# Allegro board bsmu_h750_v1.0.brd
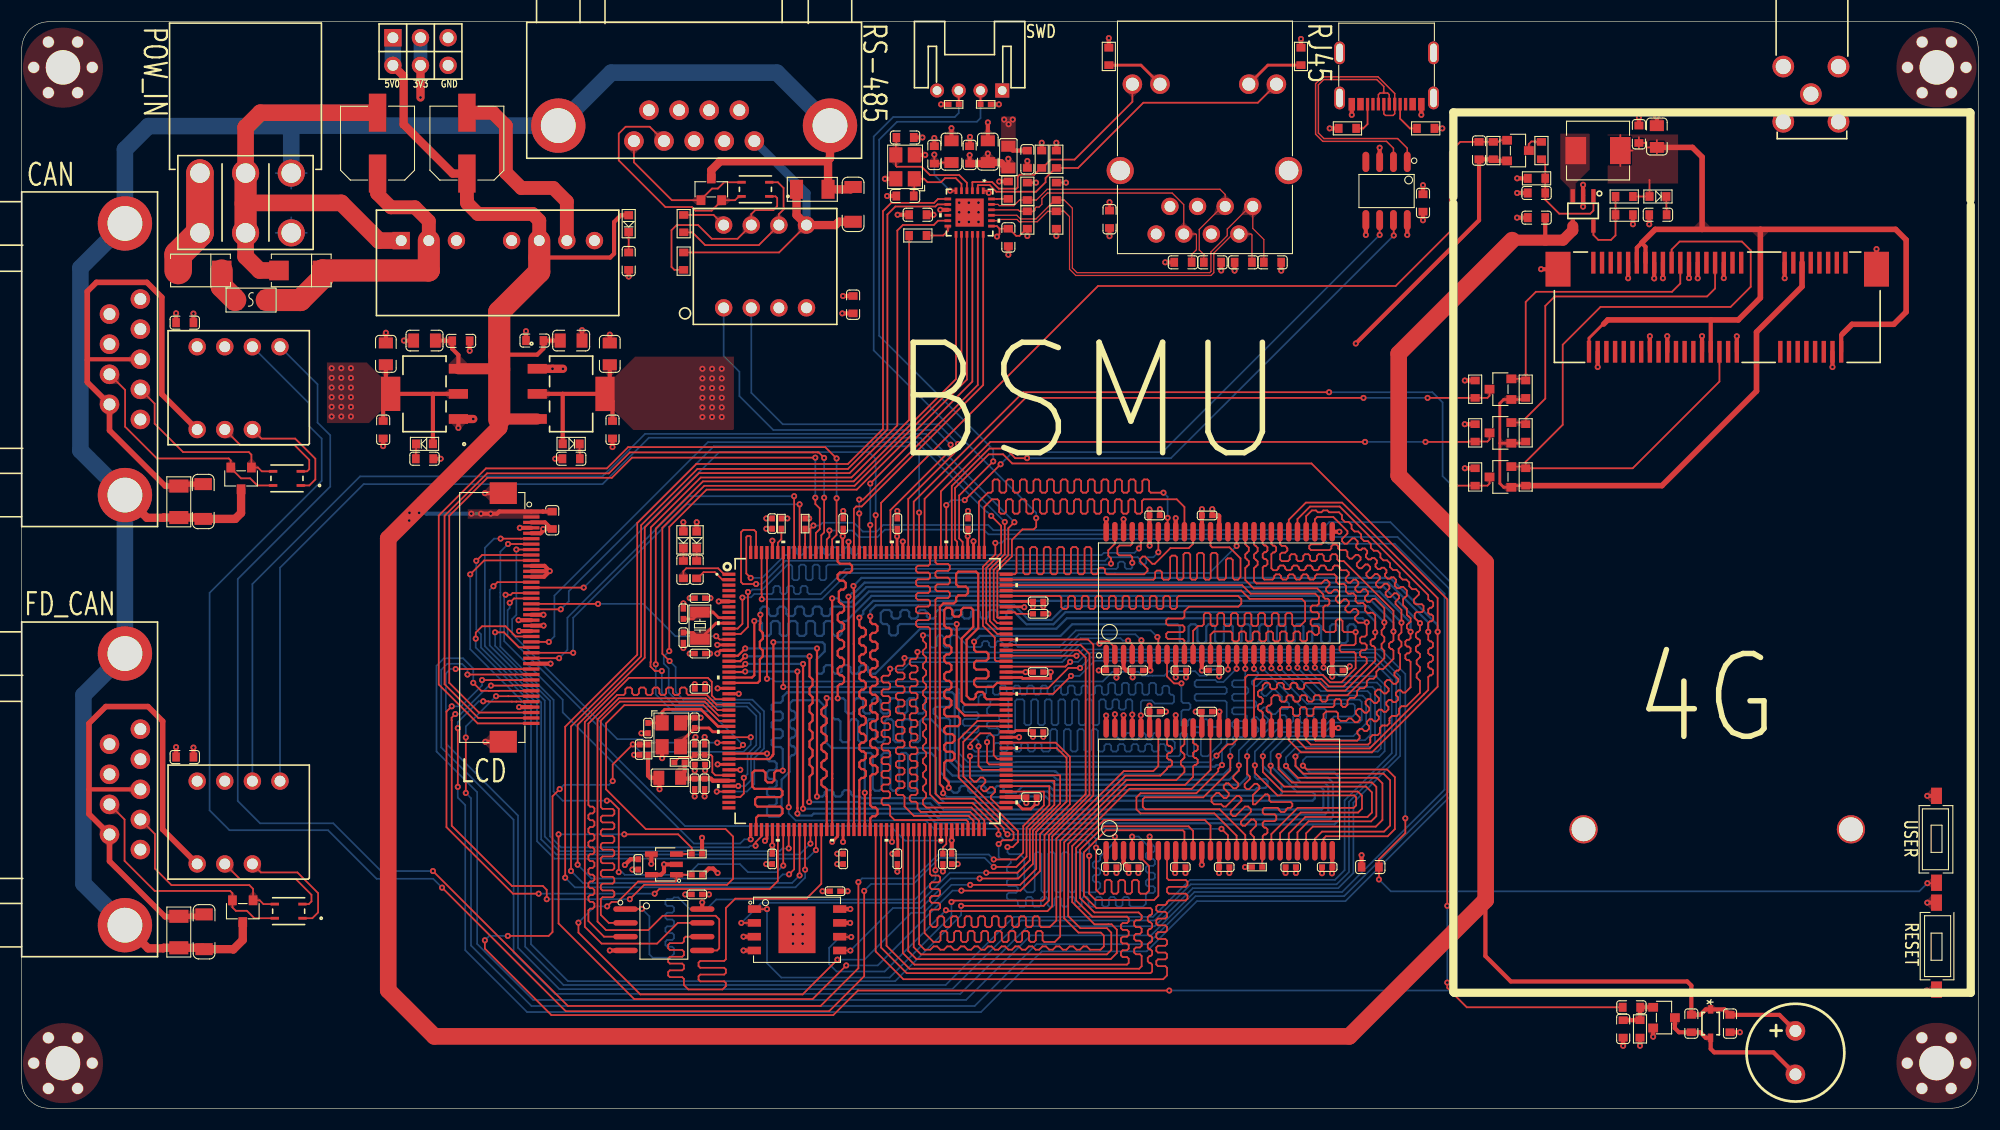
[diagram p0: board, top side]
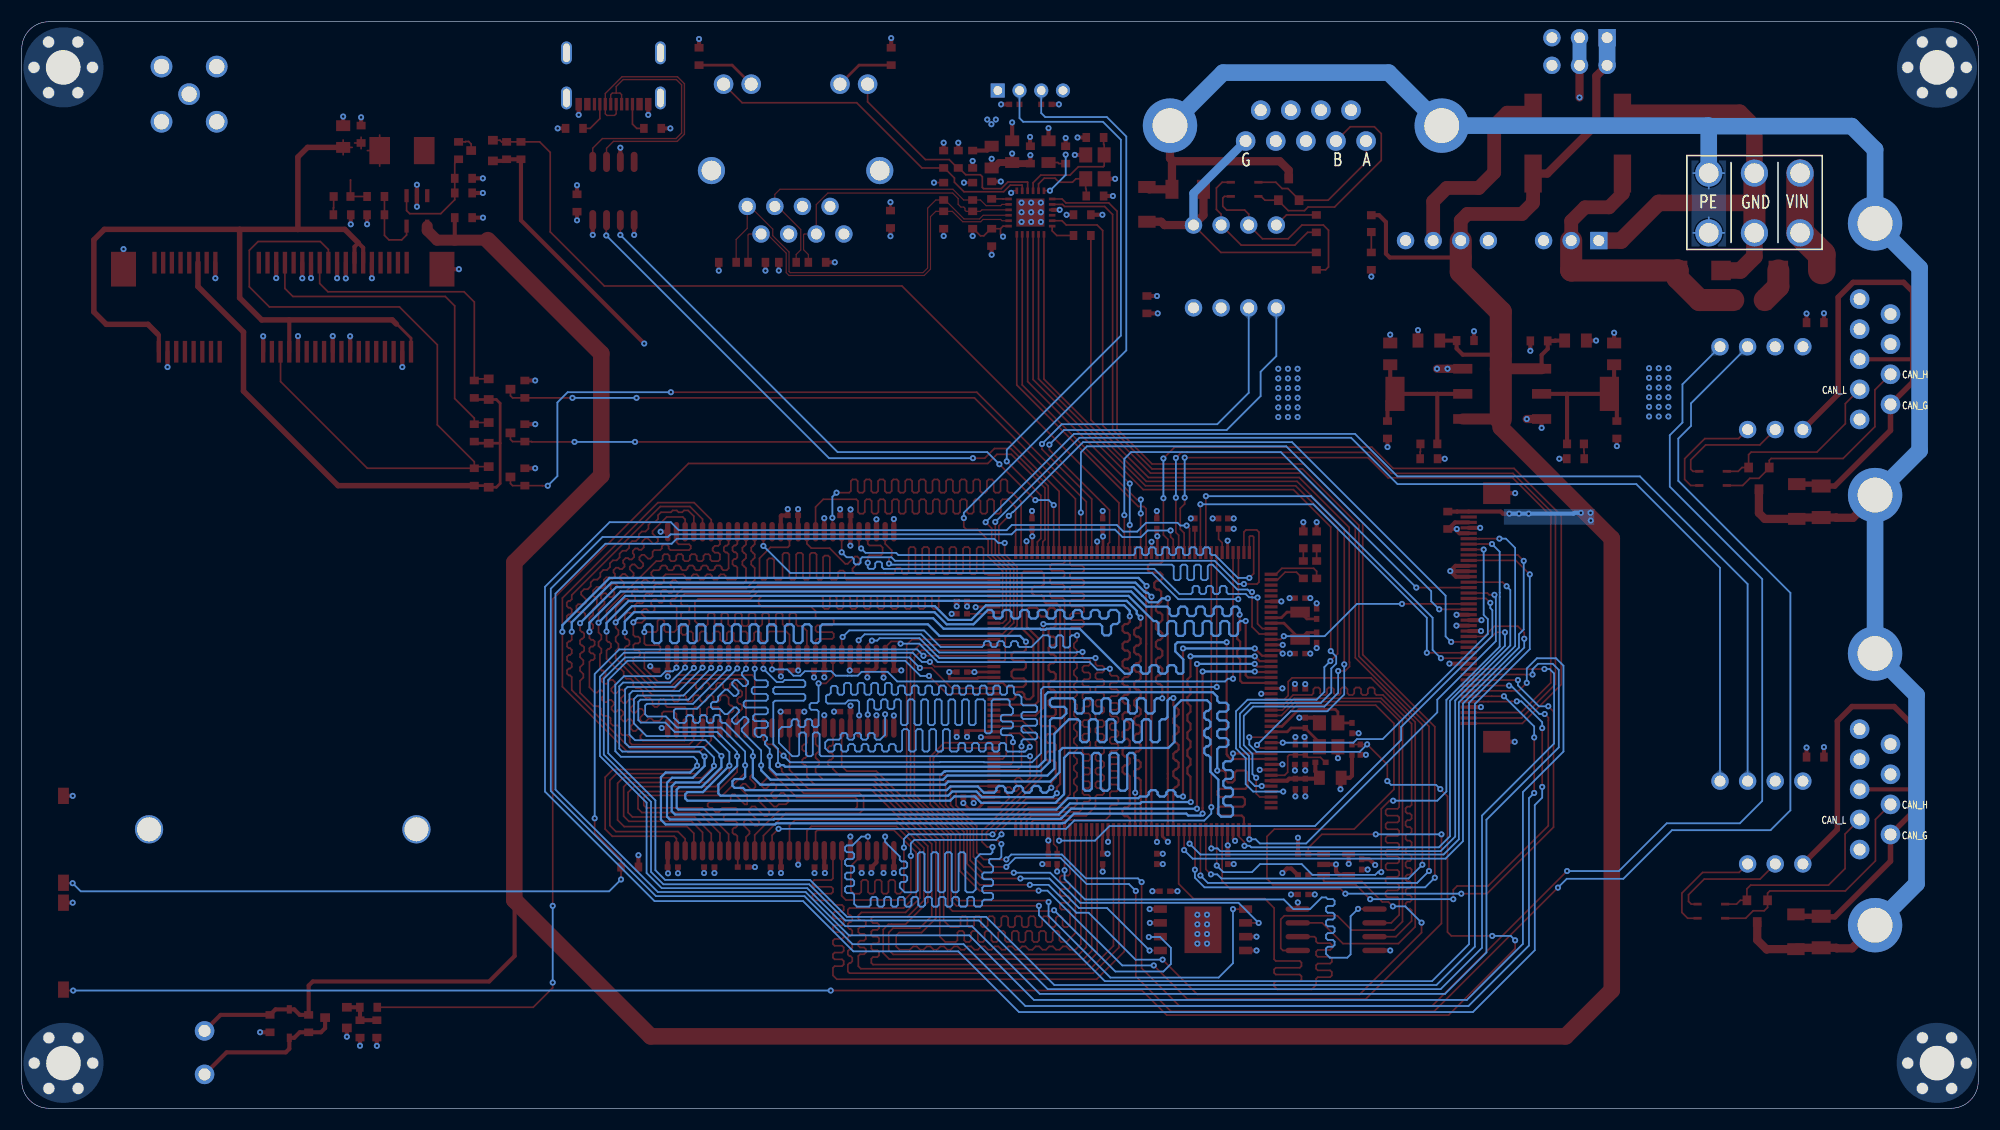
[diagram p1: board, bottom side, seen from below]

Outline 180 x 100 mm; copper layers: TOP, GND, VCC, BOTTOM. Coordinates in mm from the lower left corner of the outline.
Outline path: 0,97.5 0,2.5 arc(0.73,0.73) 2.5,0 177.5,0 arc(179.27,0.73) 180,2.5 180,97.5 arc(179.27,99.27) 177.5,100 2.5,100 arc(0.73,99.27) 0,97.5

## Design rules (mm)
constraint set DEFAULT: min track width 0.156
net group D: nets DN DP
net group TPRX: nets TPRX+ TPRX-
net group TPTX: nets TPTX+ TPTX-
net group MG_QSPI: nets QUADSPI_BK1_IO0 QUADSPI_BK1_IO1 QUADSPI_BK1_IO2 QUADSPI_BK1_IO3 QUADSPI_BK1_NCS QUADSPI_CLK
net group MG_SDRAM_DATA_0_7: nets FMC_D0 FMC_D1 FMC_D2 FMC_D3 FMC_D4 FMC_D5 FMC_D6 FMC_D7 FMC_NBL0
net group MG_SDRAM_DATA_8_15: nets FMC_D8 FMC_D9 FMC_D10 FMC_D11 FMC_D12 FMC_D13 FMC_D14 FMC_D15 FMC_NBL1
net group MG_SDRAM_DATA_16_23: nets FMC_D16 FMC_D17 FMC_D18 FMC_D19 FMC_D20 FMC_D21 FMC_D22 FMC_D23 FMC_NBL2
net group MG_SDRAM_DATA_24_31: nets FMC_D24 FMC_D25 FMC_D26 FMC_D27 FMC_D28 FMC_D29 FMC_D30 FMC_D31 FMC_NBL3
net group POWER: nets CAN_GND POWER_IN VDDA_CORE

## Placement (name value [footprint] x y rotation side)
C13  22pF  [C0402]  57.62 34.99 90 top
C14  2.2uF  [C0402]  93.51 45.51 0 top
C15  22pF  [C0402]  61.91 35.47 90 top
C16  2.2uF  [C0402]  84.75 22.95 270 top
C17  100nF  [C0402]  116.75 22.2 0 top
C18  22pF  [C0402]  60.87 45.51 270 top
C19  22pF  [C0402]  60.87 43.31 90 top
C20  100nF  [C0402]  56.86 33.01 270 top
C21  1uF  [C0402]  62.82 29.86 270 top
C22  100nF  [C0402]  61.91 29.86 270 top
C23  1uF  [C0402]  61.91 33.01 90 top
C24  100nF  [C0402]  62.82 33.01 90 top
C25  100nF  [C0402]  69.05 53.81 90 top
C26  100nF  [C0402]  62.39 46.95 180 top
C27  100nF  [C0402]  62.39 41.85 180 top
C28  100nF  [C0402]  62.39 38.6 180 top
C29  100nF  [C0402]  62.39 31.64 180 top
C30  100nF  [C0402]  69.05 22.95 270 top
C31  100nF  [C0402]  75.58 22.95 270 top
C32  100nF  [C0402]  80.55 22.95 270 top
C33  100nF  [C0402]  85.56 22.95 270 top
C34  100nF  [C0402]  92.9 28.64 0 top
C35  100nF  [C0402]  93.51 34.63 0 top
C36  100nF  [C0402]  93.51 40.15 0 top
C37  100nF  [C0402]  93.51 46.65 0 top
C38  100nF  [C0402]  75.58 53.81 90 top
C39  100nF  [C0402]  80.55 53.81 90 top
C40  100nF  [C0402]  87.06 53.81 90 top
C41  100nF  [C0402]  104.23 54.56 0 top
C42  100nF  [C0402]  109.05 54.56 0 top
C43  100nF  [C0402]  100.24 40.3 0 top
C44  100nF  [C0402]  102.68 40.3 0 top
C45  100nF  [C0402]  106.64 40.3 0 top
C46  100nF  [C0402]  109.69 40.3 180 top
C47  100nF  [C0402]  104.23 36.5 0 top
C48  100nF  [C0402]  109.03 36.5 0 top
C49  100nF  [C0402]  100.24 22.2 0 top
C50  100nF  [C0402]  102.27 22.2 0 top
C51  100nF  [C0402]  106.59 22.2 0 top
C52  100nF  [C0402]  110.63 22.2 0 top
C53  100nF  [C0402]  62.11 19.68 180 top
C54  100nF  [C0402]  74.83 19.98 180 top
C55  100nF  [C0402]  56.73 22.44 90 top
C76  100nF  [C0603]  92.52 87.34 270 top
C77  10uF  [C0805]  88.88 88.04 90 top
C78  100nF  [C0603]  83.96 87.74 90 top
C79  10uF  [C0805]  85.54 88.04 90 top
C80  100nF  [C0603]  82.44 82.23 180 top
C81  100nF  [C0603]  87.21 87.74 90 top
C82  100nF  [C0603]  90.77 80.15 270 top
C83  22nF  [C0603]  100.08 81.82 270 top
C84  10pF  [C0603]  115.07 77.86 0 top
C85  10pF  [C0603]  112.38 77.86 180 top
C86  10pF  [C0603]  109.55 77.86 0 top
C87  10pF  [C0603]  106.83 77.86 180 top
C88  22pF  [C0603]  81.27 83.96 0 top
C89  22pF  [C0603]  81.27 89.35 0 top
C94  100nF  [C0603]  48.8 54.12 270 top
C95  100nF  [C0603]  128.92 83.32 90 top
C96  100nF  [C0402]  121.04 40.3 0 top
C97  100nF  [C0402]  120.1 22.2 180 top
C98  100nF  [C0603]  54.35 62.45 270 top
C99  10uF  [C0805]  54.1 69.43 90 top
C100  10uF  [C0805]  50.55 70.66 0 top
C101  100nF  [C0603]  47.19 70.66 180 top
C102  47uF/50V  [AEC-6R30X7R70-SM]  32.74 88.83 270 top
C103  22uF/50V  [AEC-6R30X7R70-SM]  40.96 88.83 270 top
C104  10uF  [C0805]  37.05 70.66 180 top
C105  100nF  [C0603]  40.41 70.63 0 top
C106  100nF  [C0603]  33.25 62.45 270 top
C107  10uF  [C0805]  33.5 69.43 90 top
C108  1nF/2kV  [C1206]  16.77 16.24 270 top
C109  100nF  [C0603]  15 32.32 180 top
C112  100nF  [C0603]  76.48 73.96 90 top
C113  1nF/2kV  [C1206]  76.48 83.19 90 top
C115  100nF/10V  [C0603]  134.07 88.14 90 top
C116  100nF  [C0603]  157.16 7.79 90 top
C117  100nF  [C0603]  153.6 7.79 270 top
C118  100nF  [C0603]  147.33 7.3 270 top
C119  100nF  [C0603]  15 72.3 180 top
C120  1nF/2kV  [C1206]  16.7 55.84 270 top
C121  10uF/16V  [C0603]  139.36 81.97 180 top
C122  100nF/16V  [C0603]  139.36 84.24 180 top
C123  22uF/16V  [C0805]  150.43 89.43 270 top
C124  100nF/16V  [C0603]  148.78 89.64 270 top
D1  SK34  [SMA]  16.39 77.11 180 top
D2  LED_G  [LED0603]  60.87 52.31 90 top
D3  LED_B  [LED0603]  62.09 52.31 90 top
D4  LED_R  [LED0603]  50.55 61.15 180 top
D5  TVS  [SMA]  25.66 77.11 180 top
D6  LED_R  [LED0603]  55.84 81.42 90 top
D7  LED_R  [LED0603]  37.05 61.15 0 top
D8  PESD1CAN  [SOT23-3]  20.33 18.14 180 top
D9  PESD1CAN  [SOT23-3]  63.44 84.58 0 top
D10  IN4148  [SOD-323]  155.38 7.79 270 top
D11  PESD1CAN  [SOT23-3]  20.18 57.97 180 top
D12  LED_G  [LED0603]  150.53 83.92 180 top
F1  0.5A  [F1206]  21.09 74.38 0 top
FB1  600R 100Mhz  [L0805]  59.61 30.42 0 top
FB2  220R 100Mhz  [L0805]  90.77 87.54 270 top
HOLE1  M3  [STAR-7R62-3R175]  176.19 95.8 0 top
HOLE2  M3  [STAR-7R62-3R175]  176.16 4.15 0 top
HOLE3  M3  [STAR-7R62-3R175]  3.8 4.15 0 top
HOLE4  M3  [STAR-7R62-3R175]  3.8 95.8 0 top
J1  SWD  [PH_2R0_4P_WI]  87.21 93.67 180 top
J2  -  [ATX6PIN]  16.39 80.57 0 top
J3  CONN PWR 3x2-R  [HDR3X2-2R54-TM-VM]  36.69 97.26 0 top
J4  -  [RJ45_LED]  108.81 87.36 180 top
J6  RGBLCD  [FPC40-0R50]  45.59 45.17 270 top
J8  -  [TYPE_C-16PIN]  125.56 94.77 180 top
J9  db9  [DB9_TH]  9.49 29.35 270 top
J10  -  [KH-SMA-KE-Z]  164.6 93.33 0 top
J11  db9  [DB9_TH]  61.86 90.44 180 top
J12  db9  [DB9_TH]  9.49 68.94 270 top
J13  -  [MINI_PCIE_52PIN]  155.99 73.72 180 top
L1  4.7uH  [MWSA0503]  145.02 88.14 0 top
Q1  BSS138  [SOT23-3]  136.04 66.18 90 top
Q2  BSS138  [SOT23-3]  136.04 62.16 90 top
Q3  AP3407  [SOT23-3]  137.65 88.14 270 top
Q4  1R1001  [SOT23-3]  151.09 8.34 270 top
Q5  BSS138  [SOT23-3]  136.04 58.1 90 top
R8  10k  [R0402]  57.62 33.01 90 top
R9  10k  [R0402]  72.07 53.81 90 top
R10  10k  [R0402]  88.68 92.39 180 top
R11  10k  [R0402]  85.74 92.39 0 top
R12  0R  [R0402]  60.51 31.84 180 top
R13  10k  [R0402]  69.89 53.81 90 top
R14  10k  [R0402]  113.65 22.2 0 top
R15  4.7k  [R0402]  62.11 21.48 0 top
R16  4.7k  [R0402]  62.11 23.41 0 top
R25  510R  [R0603]  82.44 80.33 0 top
R26  49.9R  [R0603]  95.18 84.39 90 top
R27  49.9R  [R0603]  95.18 81.75 270 top
R28  49.9R  [R0603]  92.52 84.39 90 top
R29  49.9R  [R0603]  92.52 81.75 270 top
R30  10k  [R0603]  93.84 87.34 90 top
R31  10k  [R0603]  95.18 87.34 90 top
R32  510R  [R0603]  117.69 96.81 270 top
R33  510R  [R0603]  100.01 96.81 270 top
R34  12.1k  [R0603]  90.77 84.49 270 top
R36  1k  [C0603]  60.87 49.57 90 top
R37  1k  [C0603]  62.09 49.57 90 top
R38  10k  [C0603]  124.06 22.2 0 top
R39  5.1k  [R0603]  129.16 90.18 180 top
R40  5.1k  [R0603]  121.96 90.18 0 top
R41  1k  [C0603]  50.55 59.78 0 top
R42  1k  [C0603]  55.84 77.97 90 top
R43  1k  [C0603]  37.05 59.78 180 top
R44  1M  [R1206]  14.45 16.22 90 top
R45  NC  [R0603]  60.89 81.42 90 top
R46  NC  [R0603]  60.89 77.97 270 top
R47  1M  [R1206]  72.73 84.58 180 top
R48  4k7  [R0603]  133.71 66.18 90 top
R49  4k7  [R0603]  133.71 62.16 90 top
R50  4k7  [R0603]  138.36 66.18 90 top
R51  4k7  [R0603]  138.36 62.16 90 top
R52  10k  [R0603]  139.81 88.14 270 top
R53  47k  [R0603]  135.39 88.14 270 top
R54  100k  [R0603]  139.36 85.59 0 top
R56  3k3  [C0603]  148.09 9.29 0 top
R57  3k3  [R0603]  148.88 7.3 270 top
R58  1M  [R1206]  14.45 55.82 90 top
R59  4k7  [R0603]  133.71 58.1 90 top
R60  4k7  [R0603]  138.36 58.1 90 top
R61  59k  [R0603]  147.43 83.92 0 top
R62  11k  [R0603]  147.43 82.23 180 top
R63  1k  [C0603]  150.53 82.23 0 top
SW1  SW_NSRT  [SW2_6R0X3R6]  176.16 14.92 270 top
SW3  USER_SW  [SW2_6R0X3R6]  176.16 24.75 90 top
T1  ACM2520  [ACM2520-601-2P-T002_TDK]  24.56 18.14 180 top
T2  ACM2520  [ACM2520-601-2P-T002_TDK]  67.5 84.58 180 top
T3  ACM2520  [ACM2520-601-2P-T002_TDK]  24.4 57.97 180 top
U3  STM32H750IBT6  [LQFP176_24X24_STM]  77.81 38.4 0 top
U4  w9825g6kh-6i  [TSOP-54-400MIL]  110.17 29.35 0 top
U5  w9825g6kh-6i  [TSOP-54-400MIL]  110.17 47.41 0 top
U6  CODE_FLASH  [SOIC-8-208MIL]  59.07 16.43 0 top
U7  DATA_FLASH  [WSON8-8X6]  71.33 16.43 0 top
U8  AT24C02  [SOT23-5]  59.07 22.44 90 top
U13  LAN8720A-CP  [QFN24-6X6_MC_MCH]  87.21 82.44 270 top
U15  CH340N  [SOP-8-150MIL]  125.56 84.42 180 top
U16  AMS1117-3V3  [SOT223]  50.55 65.75 270 top
U17  -  [VRB2405S_10WR3]  42.53 79.86 0 top
U18  AMS1117-3V3  [SOT223]  37.05 65.75 90 top
U19  -  [TD301MCANFD]  23.76 22.49 180 top
U21  -  [TD301M485]  64.58 73.67 0 top
U23  BEEP  [BEEP_D9]  163.18 5.12 270 top
U24  -  [TD301MCANFD]  23.76 62.47 180 top
U25  JW5211  [TSOT23-5]  143.64 82.59 270 top
X1  25MHz  [XTAL4-3225-SM]  59.76 34.37 270 top
X2  32.768kHz  [XTAL2-3215-SM]  62.39 44.41 90 top
X3  25MHz  [XTAL4-3225-SM]  81.27 86.64 90 top

## Library data of the parts
C13-C55 C76-C89 C94-C101 C104-C109 C112 C113 C115-C124 = CAP NP
C102 C103 = CAP POL
D1 = DIODE SCHOTTKY21_0
D2-D4 D6 D7 D12 = LED_0
D5 = DIODE TVS_1
D8 D9 D11 = PESD1CAN
D10 = DIODE_0: User Part Number: PN; Tolerance: TOL
F1 = FUSE
FB1 FB2 L1 = INDUCTOR
HOLE1-HOLE4 = M3
J1 = CON4
J2 = ATX6PIN
J3 = CONN PWR 3x2-R
J4 = RJ45_LED
J6 = CONN SOCKET 42
J8 = TYPE_C-16PIN
J9 J11 J12 = db9
J10 = KH-SMA-KE-Z
J13 = MINI_PCIE_52PIN
Q1 Q2 Q5 = BSS138_0
Q3 = MOSFET P_2
Q4 = 1R1001_2
R8-R16 R25-R34 R36-R54 R56-R63 = RESISTOR
SW1 SW3 = SW PUSHBUTTON
T1-T3 = TRANSFORMER_0: User Part Number: PN; Tolerance: TOL
U3 = STM32H750IBT6: User Part Number: PN; Tolerance: TOL
U4 U5 = w9825g6kh-6i
U6 = W25Qxx
U7 = W25Qxx_EP
U8 = AT24C02
U13 = LAN8720A-CP: User Part Number: PN; Tolerance: TOL
U15 = CH340N
U16 U18 = AMS1117: User Part Number: PN; Tolerance: TOL
U17 = VRB2405S_10WR3
U19 U24 = TD301MCANFD
U21 = TD301M485
U23 = BEEP
U25 = JW5211
X1 X3 = XTAL4
X2 = CRYSTAL/SM

## Footprints (pads in the part's own frame, mm; a bottom-side part is the same pattern mirrored in y, then rotated)
ACM2520-601-2P-T002_TDK
  rect 0.757x0.255 smd: 1(-1.268,0.65) 2(-1.268,-0.65) 3(1.268,-0.65) 4(1.268,0.65)
AEC-6R30X7R70-SM
  rect 3.5x1.6 smd: 1(2.8,0) 2(-2.8,0)
ATX6PIN
  round 2.5 hole 1.8: 1(0,5.5) 2(4.2,5.5) 3(8.4,5.5) 4(0,0) 5(4.2,0) 6(8.4,0)
BEEP_D9
  round 1.8 hole 1.1: 1(-2,0) 2(2,0)
C0402
  rect 0.55x0.5 smd: 1(-0.475,0) 2(0.475,0)
C0603
  rect 0.7x0.83 smd: 1(-0.8,0) 2(0.8,0)
C0805
  rect 1x1.3 smd: 1(-1,0) 2(1,0)
C1206
  rect 1.1x1.6 smd: 1(-1.6,0) 2(1.6,0)
DB9_TH
  round 1.8 hole 1.1: 1(5.54,1.42) 2(2.77,1.42) 3(0,1.42) 4(-2.77,1.42) 5(-5.54,1.42) 6(4.155,-1.42) 7(1.385,-1.42) 8(-1.385,-1.42) 9(-4.155,-1.42)
  round 5 hole 3.2: 10(-12.5,0) 11(12.5,0)
F1206
  rect 1.2x1.75 smd: 1(-1.45,0) 2(1.45,0)
FPC40-0R50
  rect 0.3x1.5 smd: 1(-9.75,1.288) 2(-9.25,1.288) 3(-8.75,1.288) 4(-8.25,1.288) 5(-7.75,1.288) 6(-7.25,1.288) 7(-6.75,1.288) 8(-6.25,1.288) 9(-5.75,1.288) 10(-5.25,1.288) 11(-4.75,1.288) 12(-4.25,1.288) 13(-3.75,1.288) 14(-3.25,1.288) 15(-2.75,1.288) 16(-2.25,1.288) 17(-1.75,1.288) 18(-1.25,1.288) 19(-0.75,1.288) 20(-0.25,1.288) 21(0.25,1.288) 22(0.75,1.288) 23(1.25,1.288) 24(1.75,1.288) 25(2.25,1.288) 26(2.75,1.288) 27(3.25,1.288) 28(3.75,1.288) 29(4.25,1.288) 30(4.75,1.288) 31(5.25,1.288) 32(5.75,1.288) 33(6.25,1.288) 34(6.75,1.288) 35(7.25,1.288) 36(7.75,1.288) 37(8.25,1.288) 38(8.75,1.288) 39(9.25,1.288) 40(9.75,1.288)
  rect 2x2.5 smd: 41(-11.44,-1.288) 42(11.44,-1.288)
HDR3X2-2R54-TM-VM
  rect 1.6x1.6 hole 1: 1(-2.54,1.27)
  round 1.6 hole 1: 2(0,1.27) 3(2.54,1.27) 4(-2.54,-1.27) 5(0,-1.27) 6(2.54,-1.27)
KH-SMA-KE-Z
  round 2 hole 1.4: 1(0,0) 2(-2.54,2.54) 3(2.54,2.54) 4(-2.54,-2.54) 5(2.54,-2.54)
L0805
  rect 1x1.3 smd: 1(-1,0) 2(1,0)
LED0603
  rect 0.75x0.8 smd: 1(-0.775,0) 2(0.775,0)
LQFP176_24X24_STM
  rect 1.194x0.305 smd: 1(-12.75,10.75) 2(-12.75,10.25) 3(-12.75,9.75) 4(-12.75,9.25) 5(-12.75,8.75) 6(-12.75,8.25) 7(-12.75,7.75) 8(-12.75,7.25) 9(-12.75,6.75) 10(-12.75,6.25) 11(-12.75,5.75) 12(-12.75,5.25) 13(-12.75,4.75) 14(-12.75,4.25) 15(-12.75,3.75) 16(-12.75,3.25) 17(-12.75,2.75) 18(-12.75,2.25) 19(-12.75,1.75) 20(-12.75,1.25) 21(-12.75,0.75) 22(-12.75,0.25) 23(-12.75,-0.25) 24(-12.75,-0.75) 25(-12.75,-1.25) 26(-12.75,-1.75) 27(-12.75,-2.25) 28(-12.75,-2.75) 29(-12.75,-3.25) 30(-12.75,-3.75) 31(-12.75,-4.25) 32(-12.75,-4.75) 33(-12.75,-5.25) 34(-12.75,-5.75) 35(-12.75,-6.25) 36(-12.75,-6.75) 37(-12.75,-7.25) 38(-12.75,-7.75) 39(-12.75,-8.25) 40(-12.75,-8.75) 41(-12.75,-9.25) 42(-12.75,-9.75) 43(-12.75,-10.25) 44(-12.75,-10.75) 89(12.75,-10.75) 90(12.75,-10.25) 91(12.75,-9.75) 92(12.75,-9.25) 93(12.75,-8.75) 94(12.75,-8.25) 95(12.75,-7.75) 96(12.75,-7.25) 97(12.75,-6.75) 98(12.75,-6.25) 99(12.75,-5.75) 100(12.75,-5.25) 101(12.75,-4.75) 102(12.75,-4.25) 103(12.75,-3.75) 104(12.75,-3.25) 105(12.75,-2.75) 106(12.75,-2.25) 107(12.75,-1.75) 108(12.75,-1.25) 109(12.75,-0.75) 110(12.75,-0.25) 111(12.75,0.25) 112(12.75,0.75) 113(12.75,1.25) 114(12.75,1.75) 115(12.75,2.25) 116(12.75,2.75) 117(12.75,3.25) 118(12.75,3.75) 119(12.75,4.25) 120(12.75,4.75) 121(12.75,5.25) 122(12.75,5.75) 123(12.75,6.25) 124(12.75,6.75) 125(12.75,7.25) 126(12.75,7.75) 127(12.75,8.25) 128(12.75,8.75) 129(12.75,9.25) 130(12.75,9.75) 131(12.75,10.25) 132(12.75,10.75)
  rect 0.305x1.194 smd: 45(-10.75,-12.75) 46(-10.25,-12.75) 47(-9.75,-12.75) 48(-9.25,-12.75) 49(-8.75,-12.75) 50(-8.25,-12.75) 51(-7.75,-12.75) 52(-7.25,-12.75) 53(-6.75,-12.75) 54(-6.25,-12.75) 55(-5.75,-12.75) 56(-5.25,-12.75) 57(-4.75,-12.75) 58(-4.25,-12.75) 59(-3.75,-12.75) 60(-3.25,-12.75) 61(-2.75,-12.75) 62(-2.25,-12.75) 63(-1.75,-12.75) 64(-1.25,-12.75) 65(-0.75,-12.75) 66(-0.25,-12.75) 67(0.25,-12.75) 68(0.75,-12.75) 69(1.25,-12.75) 70(1.75,-12.75) 71(2.25,-12.75) 72(2.75,-12.75) 73(3.25,-12.75) 74(3.75,-12.75) 75(4.25,-12.75) 76(4.75,-12.75) 77(5.25,-12.75) 78(5.75,-12.75) 79(6.25,-12.75) 80(6.75,-12.75) 81(7.25,-12.75) 82(7.75,-12.75) 83(8.25,-12.75) 84(8.75,-12.75) 85(9.25,-12.75) 86(9.75,-12.75) 87(10.25,-12.75) 88(10.75,-12.75) 133(10.75,12.75) 134(10.25,12.75) 135(9.75,12.75) 136(9.25,12.75) 137(8.75,12.75) 138(8.25,12.75) 139(7.75,12.75) 140(7.25,12.75) 141(6.75,12.75) 142(6.25,12.75) 143(5.75,12.75) 144(5.25,12.75) 145(4.75,12.75) 146(4.25,12.75) 147(3.75,12.75) 148(3.25,12.75) 149(2.75,12.75) 150(2.25,12.75) 151(1.75,12.75) 152(1.25,12.75) 153(0.75,12.75) 154(0.25,12.75) 155(-0.25,12.75) 156(-0.75,12.75) 157(-1.25,12.75) 158(-1.75,12.75) 159(-2.25,12.75) 160(-2.75,12.75) 161(-3.25,12.75) 162(-3.75,12.75) 163(-4.25,12.75) 164(-4.75,12.75) 165(-5.25,12.75) 166(-5.75,12.75) 167(-6.25,12.75) 168(-6.75,12.75) 169(-7.25,12.75) 170(-7.75,12.75) 171(-8.25,12.75) 172(-8.75,12.75) 173(-9.25,12.75) 174(-9.75,12.75) 175(-10.25,12.75) 176(-10.75,12.75)
MINI_PCIE_52PIN
  round 0 hole 1.75 unplated: (-12.5,0)
  round 0 hole 1.25 unplated: (12.5,0)
  rect 0.4x2 smd: 1(-11.8,-4.1) 2(-11.4,4.1) 3(-11,-4.1) 4(-10.6,4.1) 5(-10.2,-4.1) 6(-9.8,4.1) 7(-9.4,-4.1) 8(-9,4.1) 9(-8.6,-4.1) 10(-8.2,4.1) 11(-7.8,-4.1) 12(-7.4,4.1) 13(-7,-4.1) 14(-6.6,4.1) 15(-6.2,-4.1) 16(-5.8,4.1) 17(-2.2,-4.1) 18(-1.8,4.1) 19(-1.4,-4.1) 20(-1,4.1) 21(-0.6,-4.1) 22(-0.2,4.1) 23(0.2,-4.1) 24(0.6,4.1) 25(1,-4.1) 26(1.4,4.1) 27(1.8,-4.1) 28(2.2,4.1) 29(2.6,-4.1) 30(3,4.1) 31(3.4,-4.1) 32(3.8,4.1) 33(4.2,-4.1) 34(4.6,4.1) 35(5,-4.1) 36(5.4,4.1) 37(5.8,-4.1) 38(6.2,4.1) 39(6.6,-4.1) 40(7,4.1) 41(7.4,-4.1) 42(7.8,4.1) 43(8.2,-4.1) 44(8.6,4.1) 45(9,-4.1) 46(9.4,4.1) 47(9.8,-4.1) 48(10.2,4.1) 49(10.6,-4.1) 50(11,4.1) 51(11.4,-4.1) 52(11.8,4.1)
  rect 2.3x3.2 smd: 53(-14.65,-3.5) 54(14.65,-3.5)
  round 2.6 hole 2.2: 55(-12.3,48.05) 56(12.3,48.05)
MWSA0503
  rect 1.9x2.5 smd: 1(-2.05,0) 2(2.05,0)
PH_2R0_4P_WI
  rect 1.3x1.3 hole 0.8: 1(-3,0)
  round 1.3 hole 0.8: 2(-1,0) 3(1,0) 4(3,0)
QFN24-6X6_MC_MCH
  rect 0.605x0.255 smd: 1(-2.004,1.25) 2(-2.004,0.75) 3(-2.004,0.25) 4(-2.004,-0.25) 5(-2.004,-0.75) 6(-2.004,-1.25) 13(2.004,-1.25) 14(2.004,-0.75) 15(2.004,-0.25) 16(2.004,0.25) 17(2.004,0.75) 18(2.004,1.25)
  rect 0.255x0.605 smd: 7(-1.25,-2.004) 8(-0.75,-2.004) 9(-0.25,-2.004) 10(0.25,-2.004) 11(0.75,-2.004) 12(1.25,-2.004) 19(1.25,2.004) 20(0.75,2.004) 21(0.25,2.004) 22(-0.25,2.004) 23(-0.75,2.004) 24(-1.25,2.004)
  rect 2.591x2.591 smd: 25(0,0)
R0402
  rect 0.55x0.5 smd: 1(-0.475,0) 2(0.475,0)
R0603
  rect 0.7x0.83 smd: 1(-0.8,0) 2(0.8,0)
R1206
  rect 1.2x1.75 smd: 1(-1.45,0) 2(1.45,0)
RJ45_LED
  round 0 hole 3.3 unplated: (-5.7,-2) (5.7,-2)
  round 1.6 hole 1: 1(-4.45,4.355) 2(-3.18,6.895) 3(-1.91,4.355) 4(-0.64,6.895) 5(0.63,4.355) 6(1.9,6.895) 7(3.17,4.355) 8(4.44,6.895)
  round 1.8 hole 1.2: 9(-6.625,-6.895) 10(-4.085,-6.895) 11(4.085,-6.895) 12(6.625,-6.895)
  round 2.5 hole 1.8: 13(-7.745,1.055) 14(7.745,1.055)
SMA
  rect 1.8x1.8 smd: 1(-2,0) 2(2,0)
SOD-323
  rect 0.776x0.466 smd: 1(-1.308,0) 2(1.308,0)
SOIC-8-208MIL
  oval 2.25x0.5 smd: 1(-3.53,1.905) 2(-3.53,0.635) 3(-3.53,-0.635) 4(-3.53,-1.905) 5(3.53,-1.905) 6(3.53,-0.635) 7(3.53,0.635) 8(3.53,1.905)
SOP-8-150MIL
  oval 0.63x1.865 smd: 1(-1.905,-2.682) 2(-0.635,-2.682) 3(0.635,-2.682) 4(1.905,-2.682) 5(1.905,2.682) 6(0.635,2.682) 7(-0.635,2.682) 8(-1.905,2.682)
SOT23-3
  rect 0.8x0.9 smd: 1(-0.95,-1) 2(0.95,-1) 3(0,1)
SOT23-5
  rect 0.5x1.175 smd: 1(-0.95,-1.154) 2(0,-1.154) 3(0.95,-1.154) 4(0.95,1.154) 5(-0.95,1.154)
SOT223
  rect 0.889x1.765 smd: 1(-2.311,-3.118) 2(0,-3.118) 3(2.311,-3.118)
  rect 3.15x1.765 smd: 4(0,3.118)
STAR-7R62-3R175
  round 1.1 hole 1: 1(2.692,0) 2(-2.692,0) 3(1.346,2.332) 4(-1.346,2.332) 5(-1.346,-2.332) 6(1.346,-2.332)
  round 3.2 hole 3.15: 7(0,0)
SW2_6R0X3R6
  rect 1.5x1 smd: 1(-4,0) 2(4,0)
TD301M485
  round 1.6 hole 1: 1(0,0) 2(2.54,0) 3(5.08,0) 4(7.62,0) 5(7.62,7.62) 6(5.08,7.62) 7(2.54,7.62) 8(0,7.62)
TD301MCANFD
  round 1.6 hole 1: 1(0,-7.62) 2(2.54,-7.62) 3(5.08,-7.62) 4(7.62,-7.62) 5(7.62,0) 6(5.08,0) 7(2.54,0)
TSOP-54-400MIL
  oval 0.5x1.8 smd: 1(-10.4,-5.65) 2(-9.6,-5.65) 3(-8.8,-5.65) 4(-8,-5.65) 5(-7.2,-5.65) 6(-6.4,-5.65) 7(-5.6,-5.65) 8(-4.8,-5.65) 9(-4,-5.65) 10(-3.2,-5.65) 11(-2.4,-5.65) 12(-1.6,-5.65) 13(-0.8,-5.65) 14(0,-5.65) 15(0.8,-5.65) 16(1.6,-5.65) 17(2.4,-5.65) 18(3.2,-5.65) 19(4,-5.65) 20(4.8,-5.65) 21(5.6,-5.65) 22(6.4,-5.65) 23(7.2,-5.65) 24(8,-5.65) 25(8.8,-5.65) 26(9.6,-5.65) 27(10.4,-5.65) 28(10.4,5.65) 29(9.6,5.65) 30(8.8,5.65) 31(8,5.65) 32(7.2,5.65) 33(6.4,5.65) 34(5.6,5.65) 35(4.8,5.65) 36(4,5.65) 37(3.2,5.65) 38(2.4,5.65) 39(1.6,5.65) 40(0.8,5.65) 41(0,5.65) 42(-0.8,5.65) 43(-1.6,5.65) 44(-2.4,5.65) 45(-3.2,5.65) 46(-4,5.65) 47(-4.8,5.65) 48(-5.6,5.65) 49(-6.4,5.65) 50(-7.2,5.65) 51(-8,5.65) 52(-8.8,5.65) 53(-9.6,5.65) 54(-10.4,5.65)
TSOT23-5
  rect 1.2x0.4 smd: 1(-1.4,0.95) 2(-1.4,0) 3(-1.4,-0.95) 4(1.4,-0.95) 5(1.4,0.95)
TYPE_C-16PIN
  round 0 hole 0.65 unplated: (-2.9,1.2) (2.9,1.2)
  oval 1x2.1 hole 0.6x1.7: 1(-4.321,1.788) 2(4.321,1.788) 3(-4.321,-2.362) 4(4.321,-2.362)
  rect 0.6x1.15 smd: A1B12(-3.2,2.362) A4B9(-2.4,2.362) B1A12(3.2,2.362) B4A9(2.4,2.362)
  rect 0.3x1.15 smd: A5(-1.25,2.362) A6(-0.25,2.362) A7(0.25,2.362) A8(-1.75,2.362) B5(1.75,2.362) B6(0.75,2.362) B7(-0.75,2.362) B8(1.25,2.362)
VRB2405S_10WR3
  rect 1.6x1.6 hole 1: 1(-7.62,0)
  round 1.6 hole 1: 2(-5.08,0) 3(-2.54,0) 5(2.54,0) 6(5.08,0) 7(7.62,0) 8(10.16,0)
WSON8-8X6
  rect 1.2x0.7 smd: 1(-3.919,1.905) 2(-3.919,0.635) 3(-3.919,-0.635) 4(-3.919,-1.905) 5(3.919,-1.905) 6(3.919,-0.635) 7(3.919,0.635) 8(3.919,1.905)
  rect 3.4x4.3 smd: 9(0,0)
XTAL2-3215-SM
  rect 1x1.8 smd: 1(-1.25,0) 2(1.25,0)
XTAL4-3225-SM
  rect 1.4x1.2 smd: 1(-1.1,-0.85) 2(1.1,-0.85) 3(1.1,0.85) 4(-1.1,0.85)

## Nets
GND: C13.1 C14.2 C15.2 C16.2 C17.2 C18.1 C19.1 C20.2 C21.2 C22.2 C23.2 C24.2 C25.2 C26.2 C27.2 C28.2 C29.2 C30.2 C31.2 C32.2 C33.2 C34.2 C35.2 C36.2 C37.2 C38.2 C39.2 C40.2 C41.2 C42.2 C43.2 C44.2 C45.2 C46.2 C47.2 C48.2 C49.2 C50.2 C51.2 C52.2 C53.2 C54.2 C55.1 C76.2 C77.2 C78.2 C79.2 C80.2 C81.2 C82.2 C83.2 C84.2 C85.2 C86.2 C87.2 C88.1 C89.2 C94.2 C95.2 C96.2 C97.2 C98.2 C99.2 C100.2 C101.2 C103.2 C104.2 C105.2 C106.2 C107.2 C109.2 C112.2 C116.1 C118.2 C119.2 C121.2 C122.2 C123.1 C124.1 HOLE1.1 HOLE1.2 HOLE1.3 HOLE1.4 HOLE1.5 HOLE1.6 HOLE1.7 HOLE2.1 HOLE2.2 HOLE2.3 HOLE2.4 HOLE2.5 HOLE2.6 HOLE2.7 HOLE3.1 HOLE3.2 HOLE3.3 HOLE3.4 HOLE3.5 HOLE3.6 HOLE3.7 HOLE4.1 HOLE4.2 HOLE4.3 HOLE4.4 HOLE4.5 HOLE4.6 HOLE4.7 J1.4 J3.3 J3.6 J4.8 J4.13 J4.14 J6.3 J6.4 J6.5 J6.11 J6.12 J6.13 J6.20 J6.21 J6.22 J6.23 J6.29 J6.37 J6.41 J6.42 J8.1 J8.2 J8.3 J8.4 J8.A1B12 J8.B1A12 J10.2 J10.3 J10.4 J10.5 J13.4 J13.15 J13.18 J13.21 J13.26 J13.27 J13.29 J13.34 J13.35 J13.37 J13.38 J13.43 J13.50 J13.53 J13.54 J13.55 J13.56 Q4.2(E) R9.2 R13.2 R30.2 R31.2 R32.1 R33.1 R34.1 R39.1 R40.1 R41.1 R42.1 R43.1 R54.1 R57.2 R62.1 R63.1 SW1.1 SW3.2 U3.14 U3.22 U3.37 U3.48 U3.61 U3.71 U3.90 U3.102 U3.113 U3.126 U3.135(VSS_9) U3.148 U3.158 U4.6 U4.12 U4.28 U4.41 U4.46 U4.52 U4.54 U5.6 U5.12 U5.28 U5.41 U5.46 U5.52 U5.54 U6.4 U7.4 U7.9 U8.2 U8.5(WP) U13.25 U15.3 U16.1 U17.7 U18.1 U19.3 U21.3 U24.3 U25.2 X1.2 X1.4 X3.2 X3.4
GND_EARTH: C108.2 C113.2 C120.2 D8.3 D9.3 D11.3 J2.3 J2.6 J9.10 J9.11 J11.10 J11.11 J12.10 J12.11 R44.1 R47.1 R58.1
PGND: C102.2 D5.2 J2.2 J2.5 U17.1
VCC_3V3: C76.1 C80.1 C95.1 C106.1 C107.1 C109.1 C112.1 C119.1 D7.2 FB2.1 J1.1 J3.2 J3.5 R10.1 R11.1 U13.9(VDDIO) U15.5(VCC) U15.8 U18.2 U18.4(VOUT_1) U19.4(VCC) U21.4 U24.4(VCC)
VCC_3V3E: C77.1 C81.1 C82.1 C83.1 FB2.2 J4.4 J4.5 R26.2 R27.2 R28.2 R29.2 U13.1 U13.19
VCC_3V8: C123.2 C124.2 D12.2 J13.2 J13.24 J13.39 J13.41 J13.52 L1.2 R61.2
VCC_3V8_EN: C122.1 R52.2 R54.2 U25.1
VCC_5V0: C94.1 C100.1 C101.1 C103.1 C104.1 C105.1 C116.2 C117.1 C121.1 D6.2 D10.1(K) J3.1 J3.4 J6.1 J6.2 U16.3 U17.6(VO) U18.3 U23.1 U25.4(VIN)
VCC_24V: C102.1 D5.1(CATHODE) F1.2 U17.2
VCC_CORE_3V3: C17.1 C25.1 C26.1 C27.1 C28.1 C29.1 C30.1 C31.1 C32.1 C33.1 C34.1 C35.1 C36.1 C37.1 C38.1 C39.1 C40.1 C41.1 C42.1 C43.1 C44.1 C45.1 C46.1 C47.1 C48.1 C49.1 C50.1 C51.1 C52.1 C53.1 C54.1 C55.2 C96.1 C97.1 C98.1 C99.1 C115.1 D2.2 D3.2 D4.2 FB1.1 Q3.2 R8.1 R14.1 R15.2 R16.2 R38.1 R48.2 R49.2 R53.2 R59.2 U3.6 U3.15 U3.23 U3.36 U3.49 U3.62 U3.72 U3.82 U3.91 U3.103 U3.114 U3.127 U3.136 U3.149 U3.159 U3.172 U4.1 U4.3 U4.9 U4.14 U4.27 U4.43 U4.49 U5.1 U5.3 U5.9 U5.14 U5.27 U5.43 U5.49 U6.8 U7.3(WP#(IO2)) U7.7 U7.8 U8.4 U16.2 U16.4(VOUT_1)
VDD_EXT: J13.11 Q1.1 Q2.1 Q5.1 R50.1 R51.1 R60.1
VDDA_CORE: C21.1 C22.1 FB1.2 R12.1 U3.39
BOOT0: R9.1 U3.166
CAN2_GND: C120.1 J12.3 J12.6 R58.2 U24.5
CAN2_H: D11.2 J12.7 T3.4
CAN2_L: D11.1 J12.2 T3.3
CAN_GND: C108.1 J9.3 J9.6 R44.2 U19.5
CAN_H: D8.2 J9.7 T1.4
CAN_L: D8.1 J9.2 T1.3
DN: J8.A7 J8.B7 U15.2
DP: J8.A6 J8.B6 U15.1
FMC_A0: U3.16 U4.23 U5.23
FMC_A1: U3.17 U4.24 U5.24
FMC_A2: U3.18 U4.25 U5.25
FMC_A3: U3.19 U4.26 U5.26
FMC_A4: U3.20 U4.29 U5.29
FMC_A5: U3.21 U4.30 U5.30
FMC_A6: U3.60 U4.31 U5.31
FMC_A7: U3.63 U4.32 U5.32
FMC_A8: U3.64 U4.33 U5.33
FMC_A9: U3.65 U4.34 U5.34
FMC_A10: U3.66 U4.22 U5.22
FMC_A11: U3.67 U4.35 U5.35
FMC_A12: U3.106 U4.36 U5.36
FMC_BA0: U3.108 U4.20 U5.20
FMC_BA1: U3.109 U4.21 U5.21
FMC_D0: U3.104 U4.2
FMC_D1: U3.105 U4.4
FMC_D2: U3.142 U4.5
FMC_D3: U3.143 U4.7
FMC_D4: U3.68 U4.8
FMC_D5: U3.69 U4.10
FMC_D6: U3.70 U4.11
FMC_D7: U3.73 U4.13
FMC_D8: U3.74 U4.42
FMC_D9: U3.75 U4.44
FMC_D10: U3.76 U4.45
FMC_D11: U3.77 U4.47
FMC_D12: U3.78 U4.48
FMC_D13: U3.96 U4.50
FMC_D14: U3.97 U4.51
FMC_D15: U3.98 U4.53
FMC_D16: U3.85 U5.2
FMC_D17: U3.86 U5.4
FMC_D18: U3.87 U5.5
FMC_D19: U3.88 U5.7
FMC_D20: U3.89 U5.8
FMC_D21: U3.128 U5.10
FMC_D22: U3.129 U5.11
FMC_D23: U3.130 U5.13
FMC_D24: U3.131 U5.42
FMC_D25: U3.132 U5.44
FMC_D26: U3.133 U5.45
FMC_D27: U3.134 U5.47
FMC_D28: U3.175 U5.48
FMC_D29: U3.176 U5.50
FMC_D30: U3.11 U5.51
FMC_D31: U3.12 U5.53
FMC_NBL0: U3.169 U4.15
FMC_NBL1: U3.170 U4.39
FMC_NBL2: U3.173 U5.15
FMC_NBL3: U3.174 U5.39
FMC_SDCKE0: U3.35 U4.37 U5.37
FMC_SDCLK: U3.112 U4.38 U5.38
FMC_SDNCAS: U3.160 U4.17 U5.17
FMC_SDNE0: R14.2 U3.34 U4.19 U5.19
FMC_SDNRAS: U3.59 U4.18 U5.18
FMC_SDNWE: U3.46 U4.16(WE#) U5.16(WE#)
IIC4_SCL: R15.1 U3.100 U8.1
IIC4_SDA: R16.1 U3.101 U8.3
LINK_LED: J4.12 R30.1 U13.3
NRST: C20.1 R8.2 SW1.2 U3.31
OSC_IN_25M_H750_CORE: C13.2 U3.29 X1.1
OSC_IN_25M_H750_PERIPHERALS: C88.2 U13.5 X3.1
OSC_IN_32.768K: C18.2 U3.9 X2.2
OSC_OUT_25M_H750_CORE: C15.1 U3.30 X1.3(OSC_2)
OSC_OUT_25M_H750_PERIPHERALS: C89.1 U13.4 X3.3(OSC_2)
OSC_OUT_32.768K: C19.2 U3.10 X2.1
POWER_IN: D1.2 J2.1 J2.4(VIN_2)
QUADSPI_BK1_IO0: U3.26 U6.5
QUADSPI_BK1_IO1: U3.27 U6.2
QUADSPI_BK1_IO2: U3.25 U6.3(WP#(IO2))
QUADSPI_BK1_IO3: U3.24 U6.7
QUADSPI_BK1_NCS: U3.79 U6.1
QUADSPI_CLK: U3.58 U6.6
R485_A: D9.1 J11.1 T2.3
R485_B: D9.2 J11.2 T2.4
R485_GND: C113.1 J11.5 R46.1 R47.2 U21.5
RST_1V8: J13.22 J13.33 Q5.2(S) R60.2
RXD_1V8: J13.23 Q2.2(S) R51.2
SPEED_LED: J4.9 R31.1 U13.2
SPI2_MISO: U3.94 U7.2
SPI2_MOSI: U3.95 U7.5
SPI2_NSS: U3.118 U7.1
SPI2_SCK: U3.120 U7.6
SWCLK: J1.2 R10.2 U3.137
SWDIO: J1.3 R11.2 U3.124
TPRX+: C86.1 J4.3 R28.1 U13.23
TPRX-: C87.1 J4.6 R29.1 U13.22
TPTX+: C84.1 J4.1 R26.1 U13.21
TPTX-: C85.1 J4.2(TD-) R27.1 U13.20
TXD_1V8: J13.31 Q1.2(S) R50.2
VREF+: C23.1 C24.1 R12.2 U3.38
N86392: C78.1 C79.1 U13.6
N90065: J4.11 R33.2
N90072: J4.10 R32.2
N90988: J8.A5 R39.2
N90992: J8.B5 R40.2
N96360: C16.1 U3.81
N96423: C14.1 U3.125
N123844: U3.53 U13.11
N123848: U3.33 U13.13
N123852: R25.1 U3.42
N123856: U3.41 U13.14
N123860: U3.54 U13.8
N123864: U3.55 U13.7
N123868: U3.156 U13.17
N123872: U3.157 U13.18
N123876: U3.154 U13.16
N123880: U3.40 U13.15
N123896: J6.6 U3.56
N123900: J6.7 U3.51
N123904: J6.8 U3.32
N123908: J6.9 U3.57
N123912: J6.10 U3.110
N123924: J6.14 U3.52
N123928: J6.15 U3.153
N123932: J6.16 U3.45
N123936: J6.17 U3.80
N123940: J6.18 U3.13
N123944: J6.19 U3.145
N123960: J6.24 U3.119
N123964: J6.25 U3.121
N123968: J6.26 U3.47
N123972: J6.27 U3.167
N123976: J6.28 U3.168
N123980: J6.30 U3.111
N123984: J6.31 U3.115
N123988: J6.32 U3.50
N123992: J6.33 U3.28
N123996: J6.34 U3.116
N124000: J6.40 U3.161
N124004: J6.35 U3.162
N124008: J6.36 U3.165
N124012: J6.38 U3.164
N124016: J6.39 U3.163
N124020: U3.123 U19.2
N124024: U3.122 U19.1
N124028: U3.139 U15.7
N124032: U3.140 U15.6
N124228: R37.1 U3.2
N124232: R36.1 U3.1
N139000: R38.2 SW3.1 U3.117
N158804: D1.1(K) F1.1
N190469: T1.1 U19.7
N190473: T1.2 U19.6
N202692: Q2.3 R49.1 U3.141
N202696: Q1.3 R48.1 U3.144
N202974: U3.147 U21.2
N202978: U3.150 U21.1
N203928: R46.2 T2.1 U21.7
N203966: R45.1 T2.2 U21.6
N204356: R45.2 U21.8(VO)
N222268: Q3.3(SOURCE) R52.1
N222581: C115.2 Q3.1 R53.1 U3.152
N226786: U3.93 U24.2
N226790: U3.92 U24.1
N227901: C117.2 D10.2 Q4.3 U23.2
N228011: Q5.3 R59.1 U3.146
N228015: C118.1 Q4.1 R56.2 R57.1
N228438: R56.1 U3.138
N234113: T3.1 U24.7
N234167: T3.2 U24.6
N235985: L1.1 U25.3
N236095: R61.1 R62.2 U25.5
N0399467: R13.1 U3.171
N808202: R34.2 U13.24
N808206: R25.2 U13.12
N1037301: D2.1(CATHODE) R36.2
N1038821: D3.1(CATHODE) R37.2
N1804091: D7.1(CATHODE) R43.2
N1808161: D6.1(CATHODE) R42.2
N1936481: D4.1(CATHODE) R41.2
N2362371: D12.1(CATHODE) R63.2

Pads without a net: J4 7; J8 A4B9 A8 B4A9 B8; J9 1 4 5 8 9; J10 1; J11 3 4 6 7 8 9; J12 1 4 5 8 9; J13 1 3 5 6 7 8 9 10 12 13 14 16 17 19 20 25 28 30 32 36 40 42 44 45 46 47 48 49 51; U3 3 4 5 7 8 43 44 83 84 99 107 151 155; U4 40; U5 40; U13 10; U15 4; U17 3 5 8

## Via types
v1: diameter 0.559, hole 0.254, TOP to BOTTOM, 539 vias

## Routing (per net, layer and track width the routed paths; a pad name or vN(x,y) marks a point on that pad's centre or on a via; arc(x,y) is an arc through that point)
GND: length 368.9
  TOP w0.254: U3.135 v1(87.56,52.18) ; U3.102 v1(91.76,34.15) ; v1(92.24,46.11) 92.2,46.15 U3.126 ; U3.14 v1(63.99,42.65) ; U3.61 75.06,25.03 v1(74.56,24.52) ; U3.90 91.46,28.15 92.06,27.55 92.83,27.55 v1(93.37,28.09) ; U3.158 v1(76.06,52.13) ; U3.48 68.56,24.8 v1(68.38,24.61) ; U3.71 v1(80.06,24.52) ; U3.37 v1(66.11,31.15) ; U3.148 v1(81.06,52.16) ; U3.22 v1(64.02,38.65) ; U3.113 92,39.65 92.09,39.56 94.66,39.56 v1(94.66,40.15)
  TOP w0.381: C77.2 v1(88.88,90.73) ; R32.1 v1(117.69,98.41) ; J13.50 v1(144.99,68.22) ; C87.2 v1(105.2,77.86) ; U5.41 110.17,54.5 110.11,54.56 C42.2 v1(109.53,55.14) ; C29.2 v1(61.92,31.09) ; C32.2 v1(80.55,21.78) ; C52.2 v1(111.1,21.65) ; J6.41 v1(42.61,56.61) ; 48.55,49.42 48.05,48.92 J6.13 ; 48.55,49.42 J6.12 ; 48.55,49.42 v1(48.57,49.44) 48.09,49.92 J6.11 ; v1(143.64,85) U25.2 v1(143.64,82.98) ; C36.2 v1(94.66,40.15) ; C13.1 v1(57.01,34.51) ; R41.1 v1(49.08,59.78) ; J6.5 47.73,52.92 47.98,53.17 v1(47.98,53.32) 48.74,53.32 ; v1(87.23,89.4) 87.23,88.57 C81.2 ; J13.53 v1(170.64,79.07) ; C119.2 v1(14.2,73.17) ; J6.22 v1(48.01,44.42) ; C34.2 v1(93.37,28.09) ; X1.4 61.09,35.95 C15.2 v1(62.46,35.95) ; C20.2 v1(56.34,32.53) ; U5.54 v1(99.77,54.23) ; C122.2 v1(137.58,84.24) ; SW3.2 v1(175.31,28.75) ; C47.2 v1(105.27,36.5) ; R43.1 v1(38.54,59.78) ; U7.4 v1(66.4,14.52) ; J13.35 v1(150.99,76.39) ; C89.2 v1(82.87,89.35) ; C78.2 v1(83.96,89.3) ; C53.2 v1(61.04,19.68) ; U5.28 v1(121.22,53.06) ; R42.1 v1(55.84,76.54) ; U8.2 v1(59.09,22.44) 59.09,21.77 58.81,21.49 U8.5 ; J13.26 v1(154.59,71.06) ; Q4.2 v1(150.09,6.59) ; R39.1 v1(130.69,90.18) ; C109.2 v1(14.2,33.24) ; J13.43 v1(147.79,76.39) ; C45.2 v1(107.11,39.66) ; R31.2 v1(95.18,88.86) ; R9.2 v1(72.44,54.29) ; J6.20 v1(48,45.42) ; J13.27 v1(154.19,76.39) ; R30.2 v1(93.84,88.86) ; v1(104.71,55.13) 104.7,55.12 C41.2 ; J6.23 v1(45.75,43.92) ; C43.2 v1(100.71,39.64) ; v1(122.18,40.68) 121.8,40.3 C96.2 ; C28.2 v1(61.92,39.04) ; C51.2 v1(107.06,21.65) ; v1(102.73,21.65) 102.75,21.67 C50.2 ; J6.3 48.13,53.92 48.74,53.32 ; U4.28 v1(121.13,35) ; U4.12 v1(108.57,22.42) ; C76.2 v1(92.52,87.19) ; C106.2 v1(33.25,60.94) ; J8.B1A12 v1(122.36,91.43) ; R34.1 v1(89.93,85.29) ; U5.12 v1(108.57,40.29) 109.21,40.29 C46.2 ; C37.2 v1(93.98,46.2) ; C116.1 v1(158.07,6.99) ; C19.1 v1(60.87,42.36) ; J6.37 v1(45.76,36.92) ; C112.2 v1(75.56,74.76) ; C33.2 v1(86.11,22.47) ; 48.74,53.32 C94.2 ; C107.2 v1(33.5,71.38) ; U4.41 110.19,35.02 v1(110.19,36.5) C48.2 ; U4.46 v1(106.17,36.17) ; C31.2 v1(75.03,22.47) ; C118.2 v1(147.33,5.75) ; U5.6 103.83,41.69 v1(103.83,40.3) C44.2 ; J6.4 v1(45.82,53.42) ; J13.21 v1(156.59,76.4) ; R33.1 v1(100.01,98.49) ; X3.2 v1(83.12,87.74) ; J6.21 v1(45.71,44.92) ; C25.2 v1(68.5,54.29) ; C55.1 v1(56.18,21.97) ; U4.52 v1(101.37,36.17) ; C123.1 v1(150.43,91.28) ; R40.1 v1(120.33,90.18) ; C99.2 v1(54.1,71.2) ; C82.2 v1(90.77,78.55) ; J13.29 v1(153.39,76.4) ; X1.2 v1(58.91,32.22) ; J13.37 v1(150.19,76.38) ; C30.2 v1(68.5,22.47) ; C97.2 v1(119.63,21.63) ; C80.2 v1(80.58,82.23) ; C16.2 v1(84.75,21.79) ; C22.2 v1(61.91,28.7) ; C84.2 v1(115.87,77.09) ; J6.29 v1(48.65,40.92) ; J8.A1B12 v1(128.76,91.43) ; C54.2 v1(73.67,19.98) ; R62.1 v1(148.23,81.36) ; R13.2 v1(70.44,54.29) ; C26.2 v1(61.45,46.95) ; C24.2 v1(62.82,34.16) ; C27.2 v1(61.45,41.85) ; C35.2 v1(93.98,34.18) ; U4.6 v1(103.77,25.01) ; U15.3 v1(124.93,88.41) ; C40.2 v1(87.06,54.97) ; C105.2 v1(41.21,69.71) ; C85.2 v1(111.58,77.09) ; U4.54 v1(99.77,36.14) ; J6.42 v1(42.65,33.73) ; J13.34 v1(151.39,71.06) ; SW1.1 v1(175.31,18.92) ; J13.4 v1(166.59,68.22) ; J13.38 v1(149.79,71.05) ; C79.2 v1(85.54,90.21) ; C121.2 v1(137.57,81.97) ; C101.2 v1(46.39,71.51) ; R54.1 v1(137.58,85.59) ; C100.2 v1(51.55,71.61) ; C39.2 v1(80.55,54.97) ; C95.2 v1(128.92,84.95) ; C23.2 61.91,34.09 v1(61.99,34.16) ; C17.2 v1(117.22,21.65) ; R57.2 v1(148.88,5.75) ; U18.1 v1(40.17,62.62) ; C49.2 v1(100.71,21.65) ; C124.1 v1(148.78,91.2) ; C88.1 v1(79.61,83.96) ; C21.2 v1(62.82,28.7) ; U5.52 v1(101.37,54.2) ; C98.2 v1(54.35,60.86) ; J13.18 v1(157.79,71.05) ; X3.4 v1(79.41,85.54) ; U6.4 v1(54.1,14.52) ; v1(139.78,77.22) J13.54 ; C83.2 v1(100.08,80.26) ; R63.1 v1(149.73,81.36) ; C14.2 v1(94.45,45.51) ; C18.1 v1(60.87,46.47) ; C104.2 v1(35.16,70.66) ; C38.2 v1(75.58,54.97) ; C86.2 v1(110.35,77.1) ; U5.46 v1(106.17,54.31) ; J13.15 v1(162.19,76.39)
  TOP w0.762: U18.1 v1(41.54,63.44) ; v1(49.79,68.06) v1(48.83,68.06) U16.1
  TOP w1.27: C103.2 43.35,91.63 44.54,90.44 44.54,86.12 45.96,84.7 48.91,84.7 50.15,83.45 U17.7
  GND w0.156: HOLE4.1 6.49,96.53 ; HOLE4.1 5.76,95.8 ; HOLE4.1 7.22,95.8 ; HOLE4.1 6.49,95.07 ; J13.55 168.29,27.15 ; J13.55 168.29,24.2 ; J13.55 166.81,25.67 ; J13.55 169.77,25.67 ; 174.38,4.15 HOLE2.7 ; HOLE2.7 177.94,4.15 ; HOLE2.7 176.16,5.93 ; HOLE2.7 176.16,2.38 ; U19.3 19.66,30.11 ; U19.3 18.68,31.09 ; U19.3 17.7,30.11 ; U19.3 18.68,29.13 ; HOLE3.1 7.22,4.15 ; HOLE3.1 6.49,4.88 ; HOLE3.1 6.49,3.43 ; HOLE3.1 5.76,4.15 ; HOLE4.5 3.18,93.47 ; HOLE4.5 1.72,93.47 ; HOLE4.5 2.45,94.19 ; HOLE4.5 2.45,92.74 ; 39.23,95.01 J3.6 ; J3.6 39.23,96.97 ; J3.6 38.25,95.99 ; J3.6 40.2,95.99 ; HOLE2.4 174.81,7.21 ; HOLE2.4 174.81,5.76 ; HOLE2.4 174.09,6.49 ; HOLE2.4 175.54,6.49 ; 160.88,95.87 J10.2 ; J10.2 163.24,95.87 ; J10.2 162.06,97.05 ; J10.2 162.06,94.7 ; J10.5 168.32,90.79 ; J10.5 165.96,90.79 ; J10.5 167.14,89.62 ; J10.5 167.14,91.97 ; HOLE1.5 174.84,94.19 ; HOLE1.5 175.57,93.47 ; HOLE1.5 174.11,93.47 ; HOLE1.5 174.84,92.74 ; 116.55,84.87 J4.13 ; J4.13 116.55,87.73 ; J4.13 115.12,86.3 ; J4.13 117.98,86.3 ; HOLE4.7 5.57,95.8 ; HOLE4.7 3.8,97.58 ; HOLE4.7 3.8,94.02 ; HOLE4.7 2.02,95.8 ; 49.17,79.86 U17.7 ; U17.7 51.13,79.86 ; U17.7 50.15,78.88 ; U17.7 50.15,80.83 ; 176.19,94.02 HOLE1.7 ; HOLE1.7 176.19,97.58 ; HOLE1.7 174.41,95.8 ; HOLE1.7 177.96,95.8 ; 83.38,93.67 J1.4 ; J1.4 85.03,93.67 ; J1.4 84.21,92.84 ; J1.4 84.21,94.5 ; HOLE2.1 178.85,4.88 ; HOLE2.1 178.12,4.15 ; HOLE2.1 178.85,3.43 ; 1.1,3.43 HOLE3.2 ; HOLE3.2 1.83,4.15 ; HOLE3.2 1.1,4.88 ; HOLE1.3 177.53,98.86 ; HOLE1.3 178.26,98.13 ; HOLE1.3 176.8,98.13 ; HOLE1.3 177.53,97.4 ; J8.1 130.56,92.98 ; J8.1 129.88,94.21 ; J8.1 129.88,91.76 ; J8.1 129.21,92.98 ; 38.25,98.53 J3.3 ; J3.3 40.2,98.53 ; J3.3 39.23,97.55 ; 176.78,1.82 HOLE2.6 ; HOLE2.6 177.51,2.55 ; HOLE2.6 178.23,1.82 ; 68.68,73.67 U21.3 ; U21.3 69.66,74.64 ; U21.3 70.64,73.67 ; U21.3 69.66,72.69 ; 121.24,95.91 J8.4 ; J8.4 121.92,97.13 ; J8.4 121.24,98.36 ; J8.4 120.56,97.13 ; 176.78,6.49 HOLE2.3 ; HOLE2.3 177.51,5.76 ; HOLE2.3 178.23,6.49 ; HOLE2.3 177.51,7.21 ; HOLE3.7 5.57,4.15 ; HOLE3.7 2.02,4.15 ; HOLE3.7 3.8,5.93 ; HOLE3.7 3.8,2.38 ; 172.77,95.8 HOLE1.2 ; HOLE1.2 174.22,95.8 ; HOLE1.2 173.49,95.07 ; HOLE1.2 173.49,96.53 ; HOLE3.4 2.45,7.21 ; HOLE3.4 3.18,6.49 ; HOLE3.4 1.72,6.49 ; HOLE3.4 2.45,5.76 ; J13.56 145.17,25.67 ; J13.56 143.69,24.2 ; J13.56 142.21,25.67 ; J13.56 143.69,27.15 ; J8.3 130.56,97.13 ; J8.3 129.21,97.13 ; J8.3 129.88,95.91 ; J8.3 129.88,98.36 ; 1.72,98.13 HOLE4.4 ; HOLE4.4 3.18,98.13 ; HOLE4.4 2.45,97.4 ; HOLE4.4 2.45,98.86 ; 103.39,80.46 J4.8 ; J4.8 105.34,80.46 ; J4.8 104.37,81.44 ; J4.8 104.37,79.48 ; HOLE4.2 1.83,95.8 ; HOLE4.2 1.1,95.07 ; HOLE4.2 1.1,96.53 ; HOLE2.5 175.54,1.82 ; HOLE2.5 174.09,1.82 ; HOLE2.5 174.81,2.55 ; 18.68,69.11 U24.3 ; U24.3 18.68,71.06 ; U24.3 17.7,70.09 ; U24.3 19.66,70.09 ; 167.14,94.7 J10.3 ; J10.3 165.96,95.87 ; J10.3 168.32,95.87 ; J10.3 167.14,97.05 ; HOLE4.3 5.87,98.13 ; HOLE4.3 5.14,97.4 ; HOLE4.3 5.14,98.86 ; HOLE4.3 4.41,98.13 ; 176.8,93.47 HOLE1.6 ; HOLE1.6 177.53,94.19 ; HOLE1.6 178.26,93.47 ; HOLE1.6 177.53,92.74 ; HOLE3.3 5.14,7.21 ; HOLE3.3 5.14,5.76 ; HOLE3.3 4.41,6.49 ; HOLE3.3 5.87,6.49 ; HOLE2.2 173.47,4.88 ; HOLE2.2 174.2,4.15 ; HOLE2.2 172.74,4.15 ; HOLE2.2 173.47,3.43 ; 162.06,89.62 J10.4 ; J10.4 160.88,90.79 ; J10.4 163.24,90.79 ; J10.4 162.06,91.97 ; HOLE4.6 5.14,94.19 ; HOLE4.6 5.14,92.74 ; HOLE4.6 4.41,93.47 ; HOLE4.6 5.87,93.47 ; 121.24,91.76 J8.2 ; J8.2 121.92,92.98 ; J8.2 121.24,94.21 ; J8.2 120.56,92.98 ; 174.84,97.4 HOLE1.4 ; HOLE1.4 175.57,98.13 ; HOLE1.4 174.84,98.86 ; HOLE1.4 174.11,98.13 ; J4.14 101.06,87.73 ; J4.14 102.49,86.3 ; J4.14 99.63,86.3 ; J4.14 101.06,84.87 ; 178.88,95.07 HOLE1.1 ; HOLE1.1 178.88,96.53 ; HOLE1.1 178.15,95.8 ; HOLE3.5 2.45,2.55 ; HOLE3.5 3.18,1.82 ; HOLE3.5 1.72,1.82 ; HOLE3.6 5.87,1.82 ; HOLE3.6 4.41,1.82 ; HOLE3.6 5.14,2.55
  vias: v1(70.95,17.82) v1(70.95,16.93) v1(70.95,16.04) v1(70.95,15.15) v1(71.84,17.82) v1(71.84,16.93) v1(71.84,16.04) v1(71.84,15.15) v1(86.24,83.35) v1(86.24,82.46) v1(86.24,81.57) v1(87.13,83.35) v1(87.13,82.46) v1(87.13,81.57) v1(88.02,83.35) v1(88.02,82.46) v1(88.02,81.57)
GND_EARTH: length 208.7
  TOP w0.762: D11.3 20.18,54.78 19.64,54.24 C120.2 16.57,54.37 R58.1 13.07,54.37 13.04,54.34 11.52,54.34 9.49,56.37 J12.11 ; D8.3 20.33,15.49 19.47,14.62 19.44,14.64 C108.2 16.65,14.77 R44.1 13.07,14.77 13.02,14.72 11.62,14.72 J9.11 ; J11.10 74.36,87.43 74.18,87.25 ; 74.18,87.25 74.09,87.16 64.26,87.16 63.44,86.34 D9.3 ; 74.18,87.25 R47.1 76.27,84.58 C113.2
  BOTTOM w0.156: J2.6 24.79,82 ; J2.6 23.37,80.57 ; J2.6 26.22,80.57 ; 23.37,86.07 J2.3 ; J2.3 24.79,84.64 ; J2.3 26.22,86.07
  BOTTOM w1.524: J2.3 24.79,90.39 ; 24.79,90.39 24.79,90.39 24.84,90.44 J11.11 54.24,95.31 69.48,95.31 J11.10 ; 24.79,90.39 11.65,90.39 9.49,88.24 J12.10 5.4,77.34 5.4,60.53 J12.11 J9.10 5.68,38.03 5.68,20.67 J9.11
PGND: length 44
  TOP w1.524: U17.1 32.87,79.86 29.4,83.33 20.64,83.33 20.59,83.27 ; J2.5 20.59,78.39 21.88,77.11 D5.2 ; C102.2 21.95,91.63 20.59,90.27 J2.2
  TOP w2.032: J2.2 J2.5
VCC_3V3: length 48
  TOP w0.381: C107.1 33.5,66.19 U18.4 ; FB2.1 91.17,88.14 C76.1 ; 37.83,65.75 U18.4 ; 37.83,65.75 37.83,65.75 D7.2 ; 37.83,65.75 U18.2 ; U18.4 33.25,65.06 C106.1 ; U13.9 v1(84.51,82.69) ; U15.5 v1(123.66,80.38) ; 91.15,90.97 v1(91.17,91) ; U15.8 v1(127.47,80.38) ; C112.1 v1(75.49,73.16) ; C80.1 v1(83.88,82.23) ; R11.1 v1(84.58,92.39) ; C109.1 v1(15.8,33.2) ; R10.1 v1(89.9,92.39) ; C95.1 v1(128.92,81.73) ; C119.1 v1(15.8,73.14)
  TOP w0.762: J3.5 v1(36.69,93.03)
  VCC w0.156: 15.16,30.11 U19.4 ; U19.4 16.14,31.09 ; U19.4 16.14,29.13 ; U19.4 17.12,30.11 ; J1.1 90.21,94.5 ; J1.1 89.38,93.67 ; J1.1 91.03,93.67 ; J1.1 90.21,92.84 ; 72.2,72.69 U21.4 ; U21.4 72.2,74.64 ; U21.4 73.18,73.67 ; U21.4 71.22,73.67 ; U24.4 17.12,70.09 ; U24.4 16.14,69.11 ; U24.4 15.16,70.09 ; U24.4 16.14,71.06
  BOTTOM w1.27: J3.2 J3.5
  vias: v1(28.51,68.11) v1(28.51,67.22) v1(28.51,66.33) v1(28.51,65.44) v1(28.51,64.56) v1(28.51,63.67) v1(29.4,68.11) v1(29.4,67.22) v1(29.4,66.33) v1(29.4,65.44) v1(29.4,64.56) v1(29.4,63.67) v1(30.29,68.11) v1(30.29,67.22) v1(30.29,66.33) v1(30.29,65.44) v1(30.29,64.56) v1(30.29,63.67) v1(90.38,91) v1(90.79,90.56)
VCC_3V3E: length 23.3
  TOP w0.156: U13.19 89.72,81.19 89.95,80.95 ; R26.2 v1(96.07,85.19) ; U13.1 88.78,84.44 v1(88.97,84.25) ; 89.95,80.95 89.95,80.46 v1(89.72,80.23) ; 89.95,80.95 C82.1 90.83,80.95 91.49,80.3 91.8,80.3 92.45,80.95 R29.2
  TOP w0.254: R29.2 v1(92.52,80.28) ; R28.2 v1(93.32,85.19) ; R27.2 v1(95.18,80.28) ; C83.1 v1(100.08,83.39)
  TOP w0.381: FB2.2 v1(90.77,87.39) ; C77.1 v1(88.88,87.87) ; C81.1 v1(87.21,87.72)
  TOP w0.635: FB2.2 90.59,86.54 90.09,87.04 C77.1 88.78,86.94 C81.1
  VCC w0.156: J4.4 109.45,81.44 ; J4.4 110.42,80.46 ; J4.4 108.47,80.46 ; J4.4 109.45,79.48 ; J4.5 108.18,83.98 ; J4.5 109.15,83 ; J4.5 108.18,82.02 ; J4.5 107.2,83
VCC_3V8: length 94.1
  TOP w0.156: C124.2 148.78,89.37 ; C124.2 148.78,88.31 ; C124.2 149.37,88.84 ; 147.07,86.71 L1.2 ; L1.2 147.07,89.57 ; L1.2 148.2,88.14 ; 149.6,88.43 C123.2 ; C123.2 150.43,89.11 ; C123.2 150.43,87.76 ; 149.74,85.43 149.75,85.42 D12.2 R61.2
  TOP w0.254: J13.52 144.19,70.88 145.48,72.18 145.53,72.18
  TOP w0.381: J13.41 148.59,79.2 149.03,79.64 149.39,79.29 J13.39 ; J13.2 167.39,71.15 167.5,71.26 ; J13.24 155.39,72.54 155.41,72.56
  TOP w0.508: 159.95,80.89 154.6,80.89 ; 159.95,80.89 159.95,74.59 157.92,72.56 145.91,72.56 145.53,72.18 ; 159.95,80.89 172.4,80.89 173.37,79.92 173.37,73.29 172.22,72.15 168.39,72.15 167.5,71.26 ; 154.6,80.89 150.28,80.89 149.03,79.64 ; 154.6,80.89 154.6,87.54 153.7,88.43 C123.2
VCC_3V8_EN: length 10.3
  TOP w0.156: R52.2 140.16,86.99 R54.2 C122.1 140.16,83.62 141.45,82.34 144.31,82.34 144.59,82.62 U25.1
VCC_5V0: length 380.6
  TOP w0.381: 47.61,78.3 54.14,78.3 54.49,78.65 54.49,81.56 55.12,82.19 D6.2 ; 140.17,79.9 140.16,79.9 C121.1 ; U23.1 161.71,8.59 C116.2 156.65,9.1 D10.1 154.93,9.1 154.42,8.59 C117.1 153.6,11.29 153.22,11.67 136.99,11.67 134.66,14.01 134.66,19.14 ; v1(36.56,54.8) 36.56,56.05 43.93,63.41 ; v1(42.25,54.73) v1(43.14,54.73) 43.74,54.73 43.93,54.92 J6.1 47.95,54.92 47.95,54.92 C94.1 ; C100.1 C101.1 47.99,69.92 47.42,69.36 43.93,69.36 ; C104.1 38.91,70.66 38.94,70.63 C105.1 39.61,69.89 40.17,69.33 U18.3
  TOP w0.762: J3.4 35.14,94.99 35.14,90.53 39.65,86.03 C103.1
  TOP w1.016: U25.4 142.69,80.79 141.8,79.9 137.12,79.9 ; 43.93,68.01 43.88,68.06 U18.3 ; 43.93,63.41 43.95,63.44 U16.3
  TOP w1.27: U17.6 47.61,81.7 47,82.31 41.97,82.31 40.98,83.3 40.98,83.49 40.96,83.51 C103.1
  TOP w1.524: 43.93,63.41 43.93,62.65 33.72,52.44 33.72,10.86 37.96,6.62 122.13,6.62 134.68,19.17 134.68,50.23 126.68,58.23 126.68,69.46 137.12,79.9
  TOP w2.032: 43.93,63.41 43.93,73.29 47.61,76.98 U17.6
  BOTTOM w0.381: v1(36.56,54.8) 37.16,54.8 37.23,54.73 v1(41.36,54.73) v1(42.25,54.73) v1(43.14,54.73)
  BOTTOM w1.524: J3.4 J3.1
  vias: v1(35.67,54.8) v1(35.65,54.09)
VCC_24V: length 28.6
  TOP w1.27: C102.1 32.7,85.99 32.7,84.19 33.97,82.92 36.18,82.92 37.45,81.65 U17.2
  TOP w2.032: F1.2 25.64,74.38 27.67,76.42 27.67,77.1 D5.1 37.43,77.11 37.45,77.13 U17.2
VCC_CORE_3V3: length 127.4
  TOP w0.254: U3.36 v1(64.02,31.65) ; U3.103 91.34,34.65 91.45,34.76 92.91,34.76 C35.1 ; v1(75.53,52.65) 75.53,51.18 U3.159 ; U3.62 v1(75.56,24.51) ; U3.136 87.03,51.18 v1(87.03,52.64) ; v1(69.05,24.19) 69.06,24.21 U3.49 ; v1(92.35,40.15) 92.35,40.15 U3.114 ; v1(80.53,52.63) 80.53,51.18 U3.149 ; C37.1 92.02,46.65 U3.127 ; U3.23 v1(65.97,38.15) ; v1(63.99,41.85) 64.29,42.15 U3.15 ; U3.172 v1(69.06,52.24) ; U3.72 80.56,24.78 80.59,24.75 80.59,23.47 C32.1
  TOP w0.381: R14.1 v1(112.55,22.2) ; v1(102.2,39.66) C44.1 101.62,40.3 101.37,40.55 U5.3 ; v1(108.58,55.14) C42.1 108.58,53.07 U5.43 ; U4.9 106.17,22.25 C51.1 v1(106.11,21.65) ; U4.14 110.17,22.21 C52.1 v1(110.15,21.65) ; C25.1 v1(68.5,53.34) ; C32.1 v1(80.1,23.42) ; C98.1 54.35,65.06 U16.4 ; C35.1 v1(93.03,34.18) ; 49.77,65.75 U16.4 ; 49.77,65.75 49.77,65.75 D4.2 ; 49.77,65.75 U16.2 ; U16.4 54.1,66.19 C99.1 ; v1(120.54,21.62) 120.54,22.16 C97.1 120.57,22.21 U4.27 ; C55.2 56.01,22.92 v1(55.48,22.39) ; v1(106.16,39.66) C45.1 106.17,40.3 U5.9 ; v1(58.68,29.36) 58.68,30.36 FB1.1 57.81,30.42 57.62,30.61 R8.1 ; C17.1 v1(116.27,21.65) ; U5.1 99.77,40.3 C43.1 v1(99.08,40.3) ; v1(122.73,70.38) 134.07,81.73 C115.1 R53.2 135.54,87.19 Q3.2 ; v1(80.53,52.63) 80.55,52.65 C39.1 ; C40.1 87.06,52.67 v1(87.03,52.64) ; R16.2 v1(62.59,24.9) ; U3.82 85.56,24.65 v1(85.56,24.64) C33.1 ; v1(99.76,21.65) C49.1 99.76,23.7 U4.1 ; U7.8 v1(76.23,18.33) ; C38.1 75.58,52.7 v1(75.53,52.65) ; v1(103.77,51.78) U5.49 103.75,53.08 C41.1 v1(103.75,55.11) ; R59.2 v1(132.76,58.9) ; v1(64.02,21.65) 63.61,22.07 63.2,22.07 62.61,21.48 R15.2 ; D3.2 v1(62.09,53.94) ; U3.6 v1(64.12,46.65) ; U4.49 103.77,36.49 C47.1 v1(103.75,37.05) ; U7.3 v1(66.4,15.79) ; U4.43 108.55,35.01 C48.1 v1(108,36.5) ; v1(101.84,21.65) 101.84,22.16 C50.1 101.37,22.63 U4.3 ; U8.4 v1(57.92,22.49) ; R49.2 v1(132.76,62.96) ; R48.2 v1(132.76,66.98) ; C54.1 v1(75.98,19.98) ; D2.2 v1(60.87,53.94) ; C26.1 v1(63.36,46.95) ; U3.91 92.42,28.65 C34.1 v1(92.42,28.09) ; U5.14 110.16,41.76 C46.1 v1(110.16,39.75) ; R38.1 v1(123.26,23.29) ; U6.8 v1(62.6,18.95) ; v1(69.05,24.19) C30.1 ; C29.1 v1(62.87,31.09) ; C31.1 v1(75.03,23.42) ; U7.7 v1(76.22,17.06) ; C27.1 v1(63.33,41.85) ; U5.27 120.57,40.3 C96.1 v1(120.57,39.73) ; C36.1 v1(92.35,40.15) ; v1(63.23,19.68) C53.1 ; C37.1 v1(93.03,46.18) ; C28.1 v1(62.87,39.05)
  vias: v1(62.62,68.06) v1(62.62,67.17) v1(62.62,66.28) v1(62.62,65.39) v1(62.62,64.5) v1(62.62,63.62) v1(63.51,68.06) v1(63.51,67.17) v1(63.51,66.28) v1(63.51,65.39) v1(63.51,64.5) v1(63.51,63.62) v1(64.4,68.06) v1(64.4,67.17) v1(64.4,66.28) v1(64.4,65.39) v1(64.4,64.5) v1(64.4,63.62)
VDD_EXT: length 53.4
  TOP w0.254: 135.99,61.21 Q2.1 138.21,61.21 R51.1 ; 135.99,61.21 135.99,64.88 136.33,65.23 Q1.1 138.21,65.23 R50.1 ; 135.99,61.21 135.99,57.5 136.33,57.15 Q5.1 137.19,57.3 R60.1
  TOP w0.508: R60.1 150.9,57.3 159.6,66 159.6,71.44 163.79,75.63 J13.11
VDDA_CORE: length 6.1
  TOP w0.381: R12.1 60.99,31 60.61,30.62 FB1.2 60.7,30.33 C22.1 C21.1 63.39,30.33 63.58,30.15 U3.39
BOOT0: length 2.2
  TOP w0.156: R9.1 72.07,51.96 72.06,51.95 U3.166
CAN2_GND: length 50.7
  TOP w0.381: 6.03,68.85 6.12,68.94 J12.3
  TOP w0.508: U24.5 12.89,65.72 12.89,74.64 11.52,76.01 6.87,76.01 6.03,75.17 6.03,66.82 J12.6 8.07,62.39 13.19,57.27 R58.2 14.62,57.44 C120.1
CAN2_H: length 21.7
  TOP w0.156: J12.7 9.51,66.11 9.51,62.73 12.43,59.81 19.05,59.81 19.23,59.63 D11.2 19.23,58.92 20.17,57.98 21.02,57.98 21.67,57.32 T3.4
CAN2_L: length 17.1
  TOP w0.156: T3.3 22.08,58.62 21.73,58.97 D11.1 21.13,60.15 20.89,60.39 14.84,60.39 12.23,63.01 12.23,64.85 J12.2
CAN_GND: length 51.5
  TOP w0.381: J9.3 6.18,29.35
  TOP w0.508: U19.5 12.96,25.66 12.96,35.62 11.62,36.97 7.73,36.97 6.18,35.42 6.18,27.09 J9.6 8.07,22.74 13.19,17.62 14.4,17.62 R44.2 16.6,17.67 C108.1
CAN_H: length 22.6
  TOP w0.156: J9.7 9.46,26.58 9.46,22.77 12.23,20 19.17,20 19.38,19.79 D8.2 19.38,18.48 19.69,18.17 20.71,18.17 21.4,17.49 T1.4
CAN_L: length 18.1
  TOP w0.156: T1.3 22.24,18.79 21.89,19.14 D8.1 21.28,20.19 20.94,20.54 13.78,20.54 12.25,22.06 12.25,25.24 J9.2
DN: length 25.7
  TOP w0.129: J8.A7 125.31,91.53 125.46,91.38 126.16,91.38 126.31,91.53 J8.B7 126.31,93.4 124.78,94.93 119.67,94.93 119.04,94.3 119.04,89.65 119.7,88.99 125.56,88.99 126.2,88.35 U15.2
DP: length 24.4
  TOP w0.129: 125.31,93.43 124.96,93.43 124.81,93.29 J8.B6 ; 125.31,93.43 125.31,94.04 124.67,94.68 119.78,94.68 119.29,94.19 119.29,89.76 119.8,89.25 126.58,89.25 127.47,88.36 U15.1 ; 125.31,93.43 125.67,93.43 125.81,93.29 J8.A6
FMC_A0: length 123.3
  TOP w0.156: U4.23 117.37,25.4 118.37,26.4 124.14,26.4 124.62,26.89 124.62,29.58 124.22,29.99 116.85,29.99 115.63,31.2 v1(115.63,32.42) ; U5.23 v1(117.37,40.55)
  TOP w0.203: U3.16 65.89,41.65 v1(66.56,42.32) ; v1(73.16,42.32) v1(73.16,28.69)
  BOTTOM w0.156: v1(115.63,32.42) 117.08,33.87 123.58,33.87 124.09,34.38 124.09,38.11 123.81,38.39 119.53,38.39 v1(117.37,40.55)
  BOTTOM w0.203: v1(66.56,42.32) v1(73.16,42.32) ; v1(73.16,28.69) 73.67,28.69 73.87,28.89 73.87,29.07 74.08,29.27 74.48,29.27 74.69,29.07 74.69,28.89 74.89,28.69 75.3,28.69 75.5,28.89 75.5,29.07 75.7,29.27 76.11,29.27 76.31,29.07 76.31,28.89 76.52,28.69 77.13,28.69 77.28,28.54 83.75,28.54 84.8,27.5 119.59,27.5 119.75,27.65 119.75,29.33 119.52,29.55 117.46,29.55 115.63,31.38 v1(115.63,32.42)
FMC_A1: length 122.7
  TOP w0.156: U4.24 118.17,25.31 118.78,25.92 124.57,25.92 125.18,26.53 125.18,29.91 124.67,30.42 117.41,30.42 v1(116.32,31.51) ; U5.24 v1(118.17,40.53)
  TOP w0.203: v1(72.48,41.59) 72.48,39.74 72.76,39.46 72.76,38.93 72.48,38.65 72.48,38.12 72.76,37.84 72.76,37.3 72.48,37.02 72.48,36.49 72.76,36.21 72.76,35.68 72.48,35.4 72.48,34.86 72.76,34.59 72.76,34.05 72.48,33.77 72.48,33.24 72.76,32.96 72.76,32.43 72.48,32.15 72.48,31.61 72.76,31.33 72.76,30.8 72.48,30.52 72.48,28.21 v1(72.45,28.18) ; U3.17 66.11,41.15 66.36,41.4 66.37,41.4 v1(66.56,41.59)
  BOTTOM w0.156: v1(118.17,40.53) 119.92,38.77 124.27,38.77 124.5,38.55 124.5,33.64 124.12,33.26 117.28,33.26 116.32,32.3 v1(116.32,31.51)
  BOTTOM w0.203: v1(116.32,31.51) 116.32,31.33 117.66,29.99 119.85,29.99 120.2,29.63 120.2,27.34 119.9,27.04 84.59,27.04 83.58,28.06 77.1,28.06 76.97,28.18 v1(72.45,28.18) ; v1(66.56,41.59) v1(72.48,41.59)
FMC_A2: length 122.3
  TOP w0.156: U5.25 v1(118.97,40.56) ; U4.25 118.97,24.81 119.63,25.46 125.33,25.46 125.89,26.02 125.89,30.19 125.28,30.8 117.89,30.8 117.18,31.51 v1(117.18,32.37)
  TOP w0.203: v1(66.57,40.9) 66.32,40.65 U3.18 ; v1(71.88,40.9) v1(71.88,27.57)
  BOTTOM w0.156: v1(117.18,32.37) 117.21,32.37 117.66,32.83 124.75,32.83 125.03,33.11 125.03,38.82 124.67,39.18 120.35,39.18 v1(118.97,40.56)
  BOTTOM w0.203: v1(117.18,32.37) 117.18,31.5 118.27,30.42 120.18,30.42 120.64,29.96 120.64,26.84 120.38,26.58 110.8,26.58 110.75,26.63 84.42,26.63 84.34,26.72 84.3,26.72 83.45,27.57 v1(71.88,27.57) ; v1(66.57,40.9) v1(71.88,40.9)
FMC_A3: length 121.3
  TOP w0.156: U4.26 119.77,24.82 119.97,25.03 125.66,25.03 126.32,25.69 126.32,30.47 125.61,31.18 118.22,31.18 v1(117.87,31.54) ; U5.26 v1(119.77,40.56)
  TOP w0.203: U3.19 66.51,40.15 v1(66.56,40.2) ; v1(71.36,27.12) 71.36,27.63 71.36,27.63 v1(71.36,40.2)
  BOTTOM w0.156: v1(117.87,31.54) 117.87,32.02 118.19,32.35 124.88,32.35 125.39,32.86 125.39,38.97 124.6,39.76 121.22,39.76 120.77,40.22 120.37,40.22 120.36,40.21 120.11,40.21 v1(119.77,40.56)
  BOTTOM w0.203: v1(117.87,31.54) 118.5,30.9 120.76,30.9 121.19,30.47 121.19,26.56 120.76,26.12 110.69,26.12 110.58,26.23 84.26,26.23 84.22,26.26 84.05,26.26 83.2,27.12 72.86,27.12 72.68,26.94 71.55,26.94 v1(71.36,27.12) ; v1(66.56,40.2) v1(71.36,40.2)
FMC_A4: length 123.9
  TOP w0.156: U4.29 119.77,36.28 120,36.51 120.94,36.51 121.09,36.36 121.09,35.89 121.33,35.65 121.86,35.65 122.08,35.88 122.3,35.88 122.65,35.53 122.88,35.53 123.1,35.75 123.1,35.97 122.75,36.32 122.75,36.54 122.97,36.76 123.19,36.76 123.54,36.41 123.76,36.41 123.98,36.63 123.98,36.86 123.63,37.21 123.63,37.43 123.85,37.65 124.07,37.65 124.42,37.3 124.65,37.3 124.87,37.52 124.87,37.74 124.52,38.09 124.52,38.31 124.74,38.53 124.96,38.53 125.31,38.18 125.53,38.18 125.75,38.41 125.75,38.63 125.4,38.98 125.4,39.2 125.62,39.42 125.84,39.42 126.2,39.07 126.42,39.07 126.64,39.29 126.64,39.51 126.29,39.86 126.29,40.08 126.49,40.29 126.64,40.29 126.81,40.45 126.81,41.79 126.68,41.92 126.68,42.28 126.93,42.54 126.93,42.91 126.68,43.17 126.68,43.54 126.93,43.8 v1(126.93,44.69) 126.93,45.86 126.39,46.41 126.39,46.63 126.71,46.95 126.71,47.17 126.49,47.39 126.27,47.39 125.92,47.05 125.7,47.05 125.48,47.27 125.48,47.49 125.83,47.84 125.83,48.06 125.61,48.28 125.39,48.28 125.04,47.93 124.82,47.93 124.59,48.15 124.59,48.37 124.94,48.72 124.94,48.94 124.72,49.17 124.5,49.17 124.15,48.82 123.93,48.82 123.71,49.04 123.71,49.26 124.06,49.61 124.06,49.83 123.84,50.05 123.62,50.05 123.27,49.7 123.04,49.7 122.82,49.92 122.82,50.14 123.17,50.49 123.17,50.71 122.95,50.94 122.73,50.94 122.38,50.59 122.16,50.59 121.96,50.79 121.96,51.22 121.8,51.37 121.27,51.37 121.11,51.53 121.11,51.72 120.95,51.88 120.64,51.88 120.48,51.72 120.48,51.53 120.33,51.37 118.61,51.37 118.45,51.53 118.45,51.75 118.6,51.91 119.57,51.91 119.77,52.1 U5.29
  TOP w0.203: v1(67.4,44.84) 67.4,39.85 67.19,39.65 U3.20
  BOTTOM w0.203: v1(126.93,44.69) 124.47,47.16 78.18,47.16 75.87,44.84 75.63,44.84 75.42,44.64 75.42,43.68 75.22,43.47 74.81,43.47 74.61,43.68 74.61,44.64 74.41,44.84 74,44.84 73.8,44.64 73.8,43.68 73.59,43.47 73.19,43.47 72.98,43.68 72.98,44.64 72.78,44.84 72.38,44.84 72.17,44.64 72.17,43.68 71.97,43.47 71.56,43.47 71.36,43.68 71.36,44.64 71.16,44.84 70.75,44.84 70.55,44.64 70.55,43.68 70.34,43.47 69.94,43.47 69.73,43.68 69.73,44.64 69.53,44.84 69.12,44.84 68.92,44.64 68.92,43.68 68.72,43.47 68.31,43.47 68.11,43.68 68.11,44.64 67.9,44.84 v1(67.4,44.84)
